# Altium PCB PCB.pcbdoc (part 1 of 3)
Units mil, origin at the board's own origin, x right, y up, seen from the top; angles counter-clockwise.
Board outline 1969.98 x 1969.75 mil, 6 copper layers (Top Layer, GND1, Inner2, PWR3, Inner4, Bottom Layer); 155 components, 199 nets, 988 pads, 612 vias.
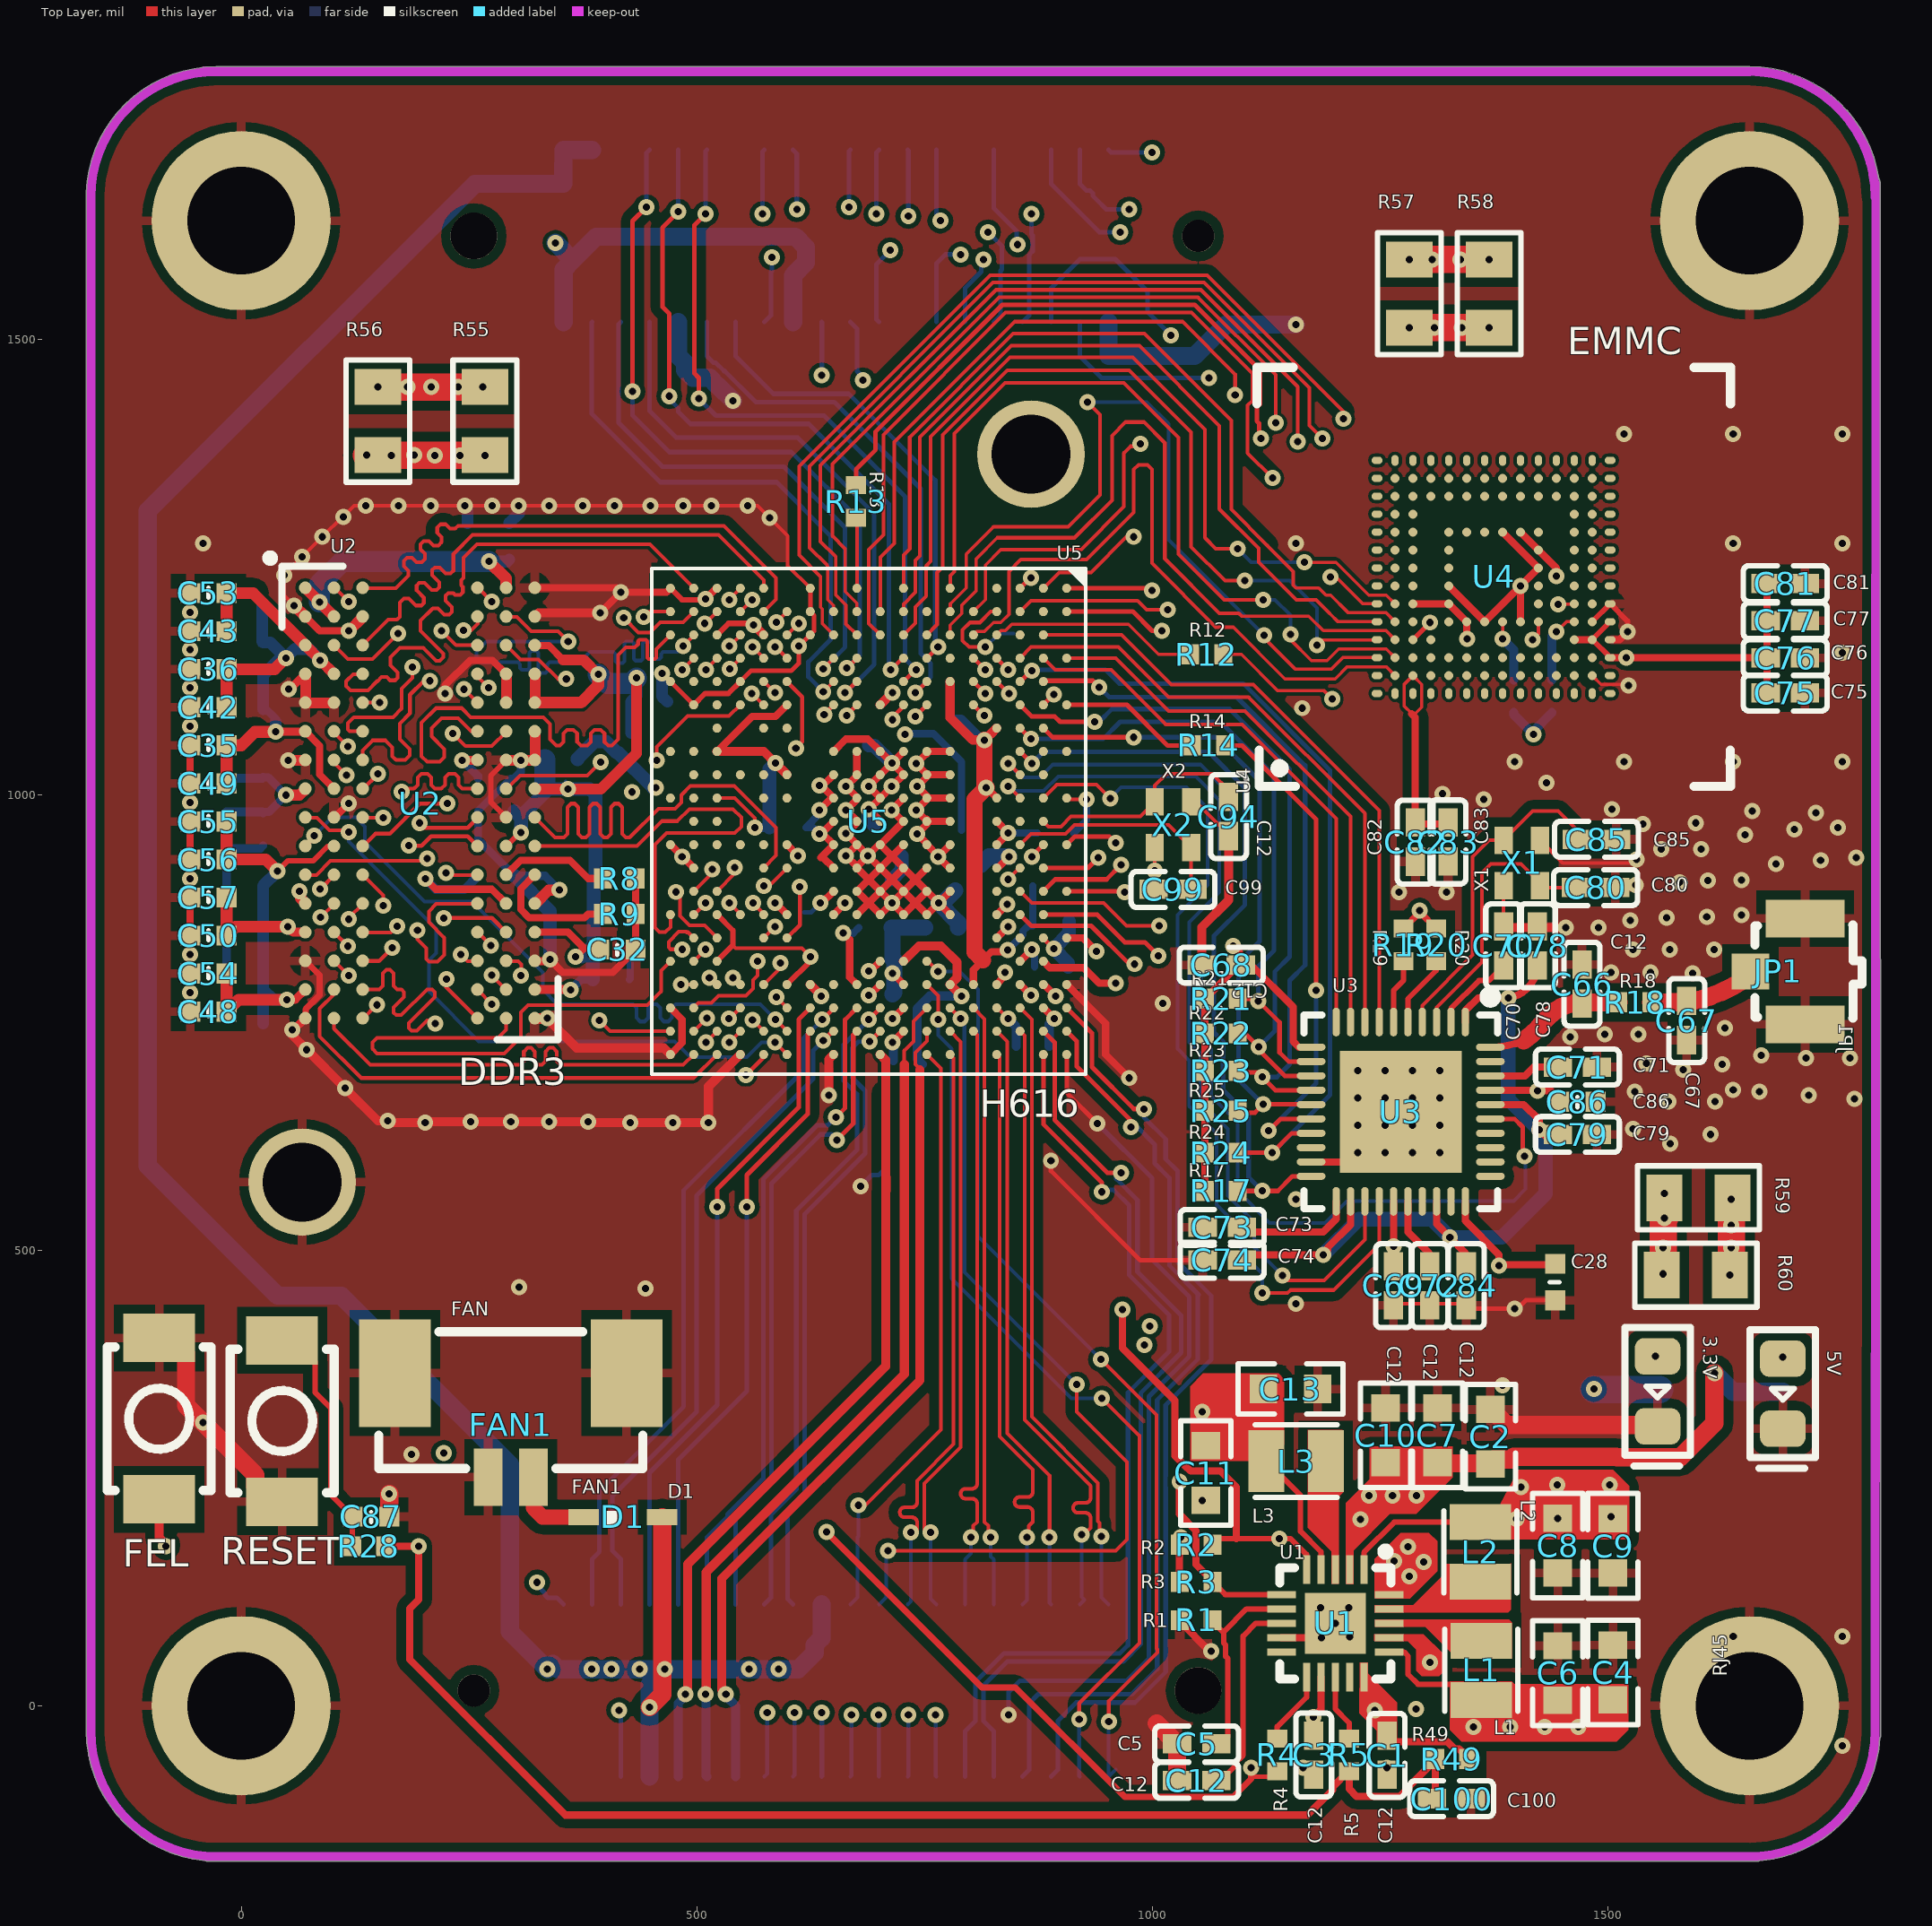
[diagram p0: Top Layer view]
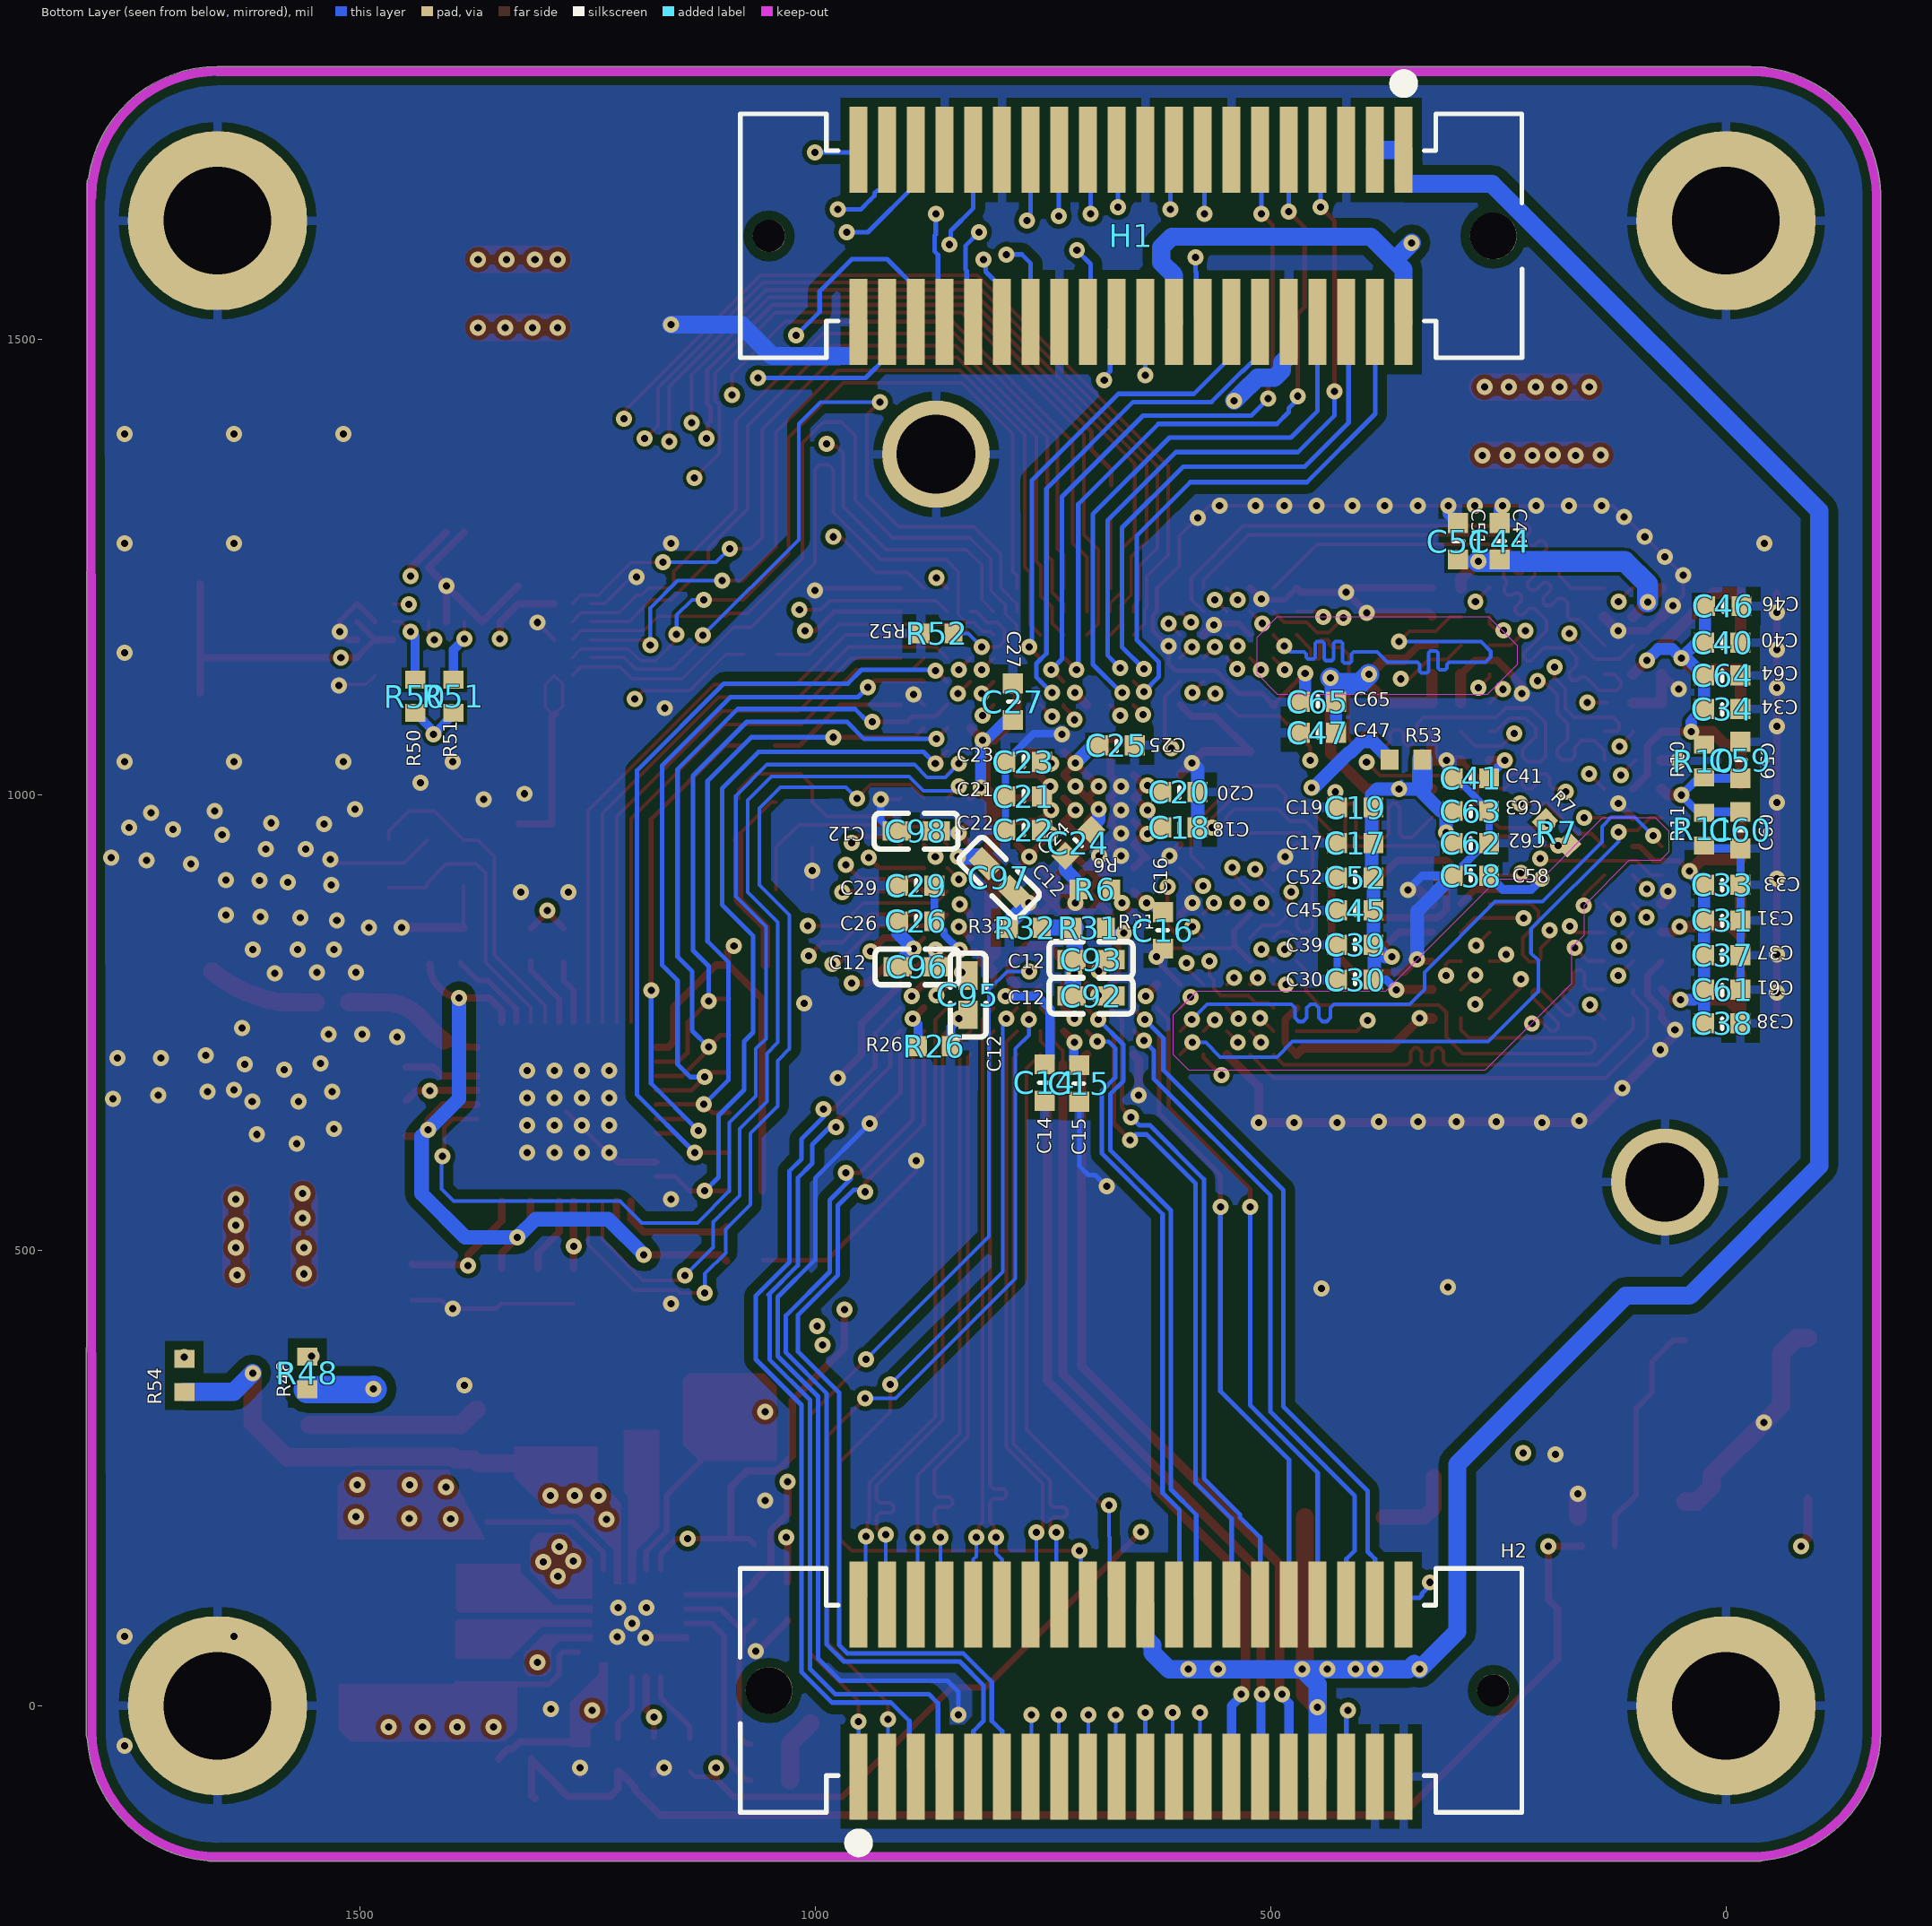
[diagram p1: Bottom Layer view, seen from below]
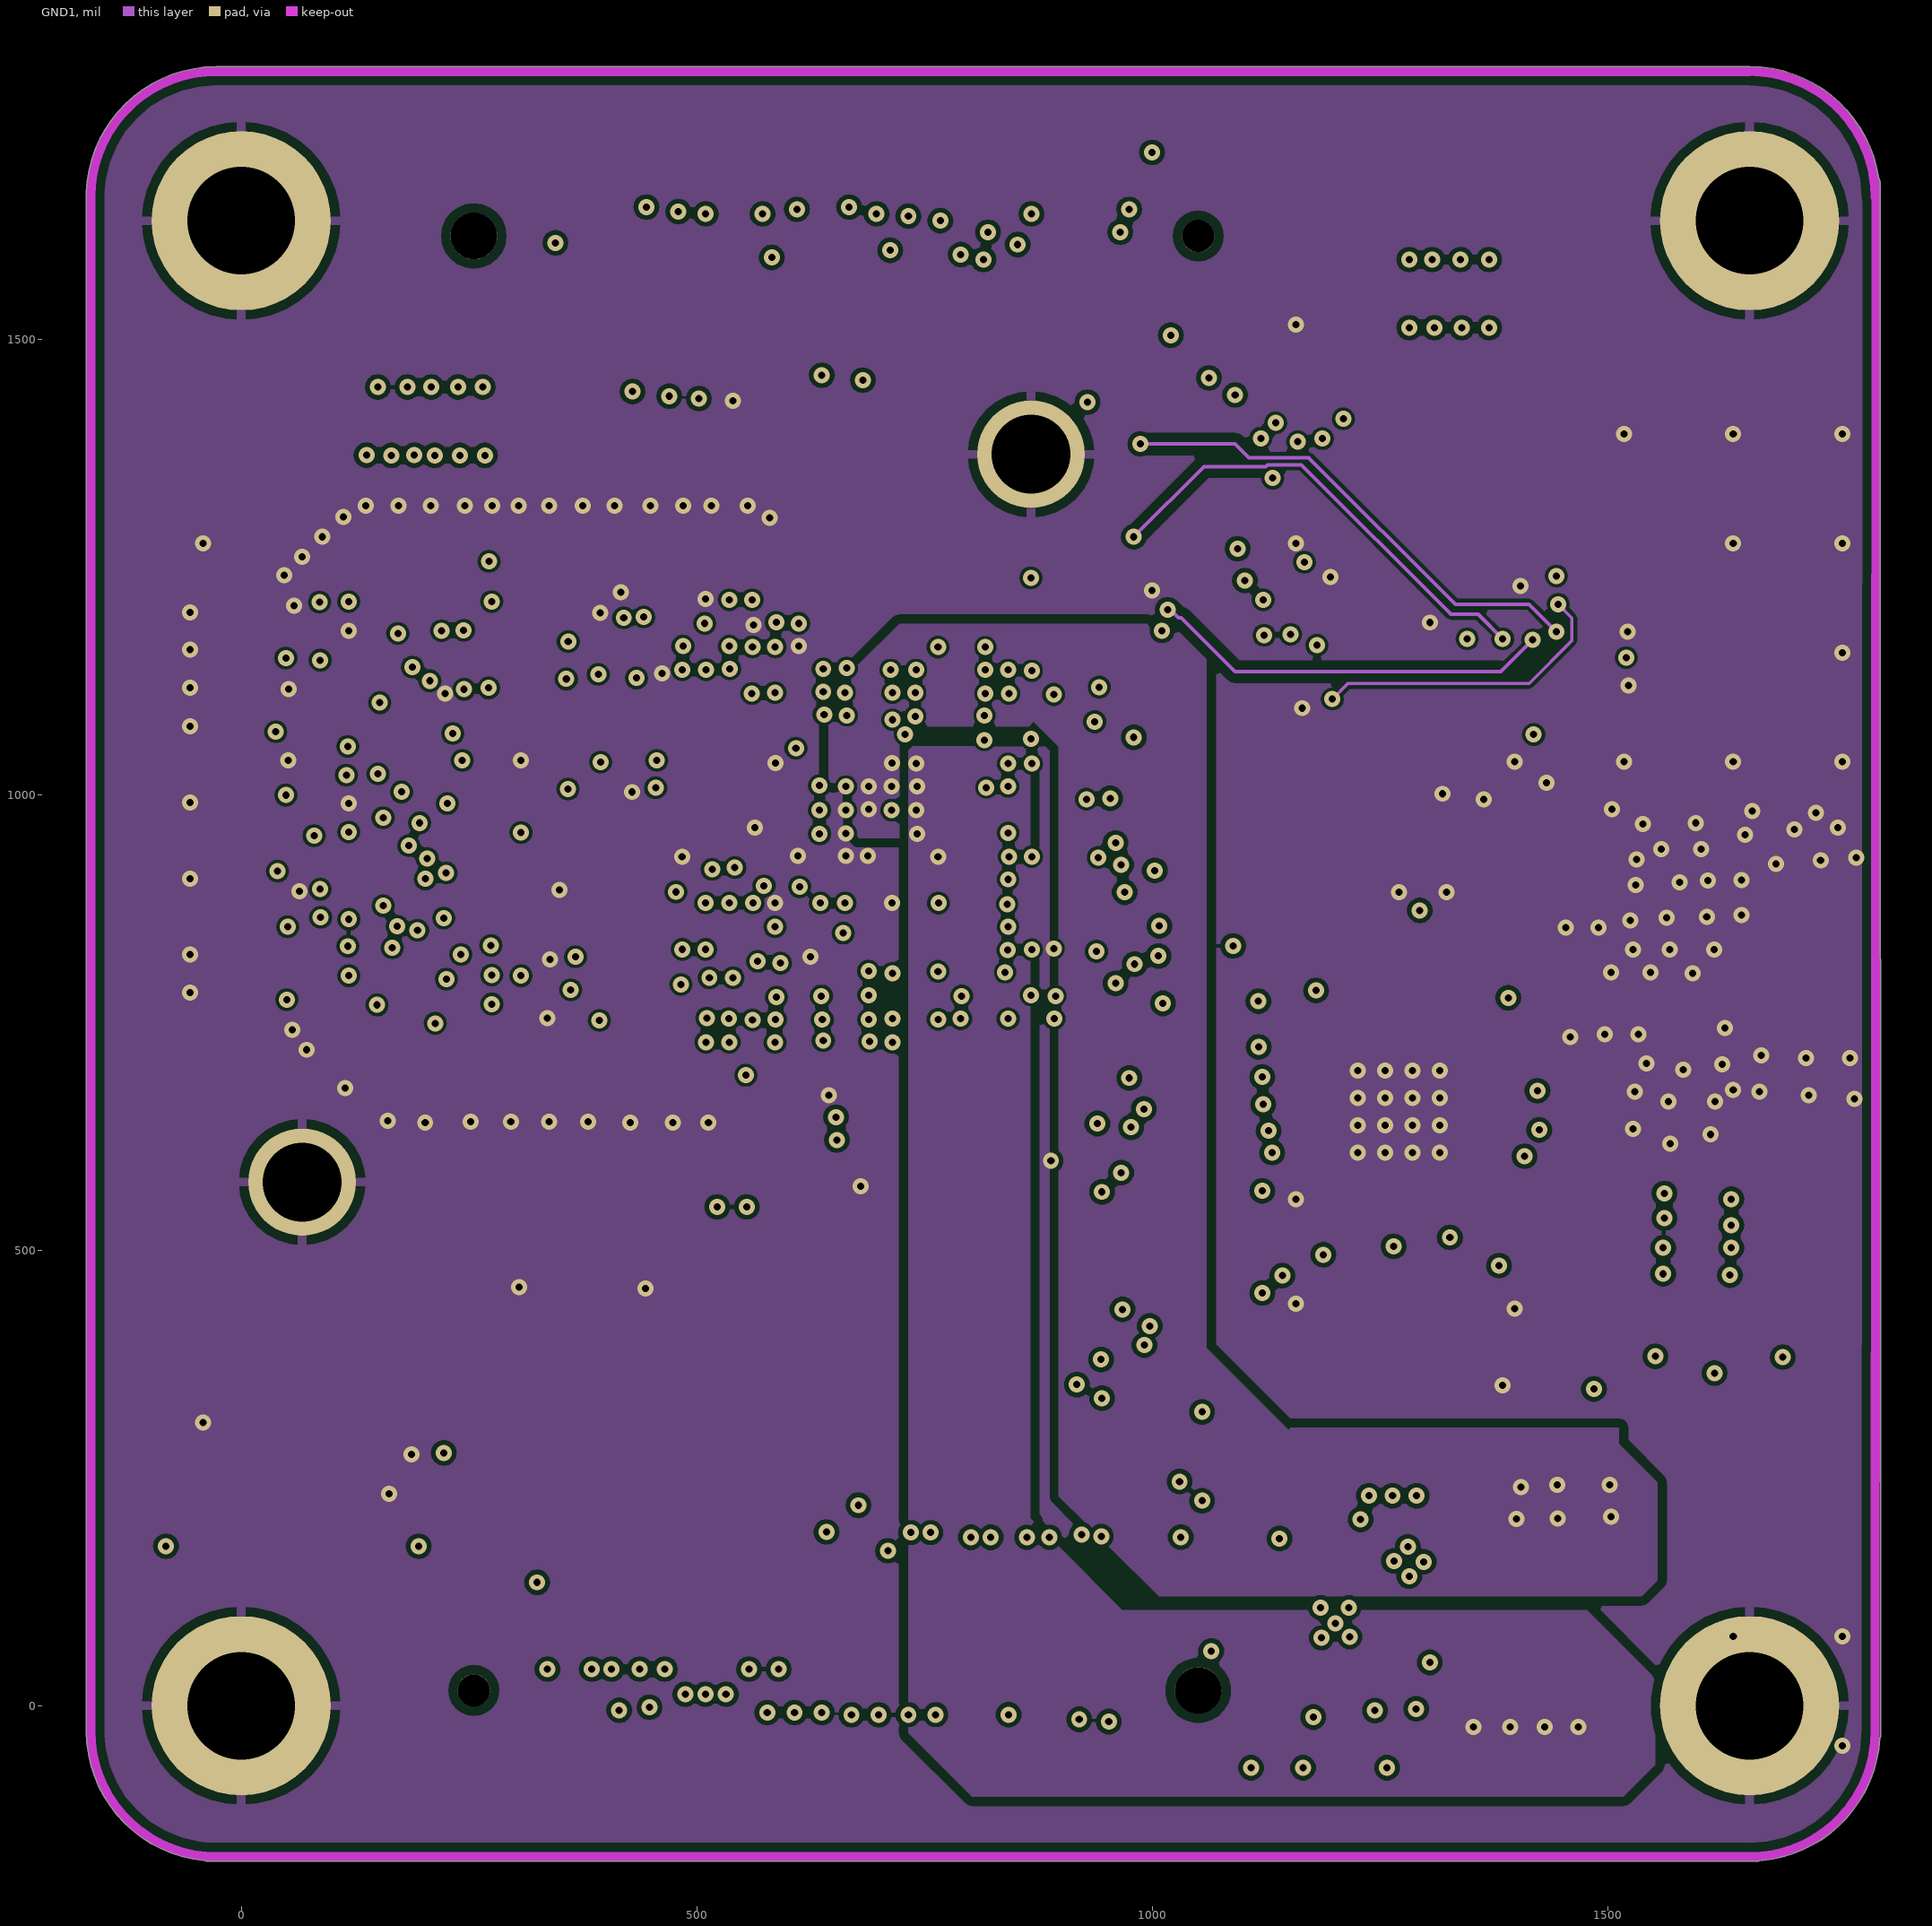
[diagram p2: GND1]
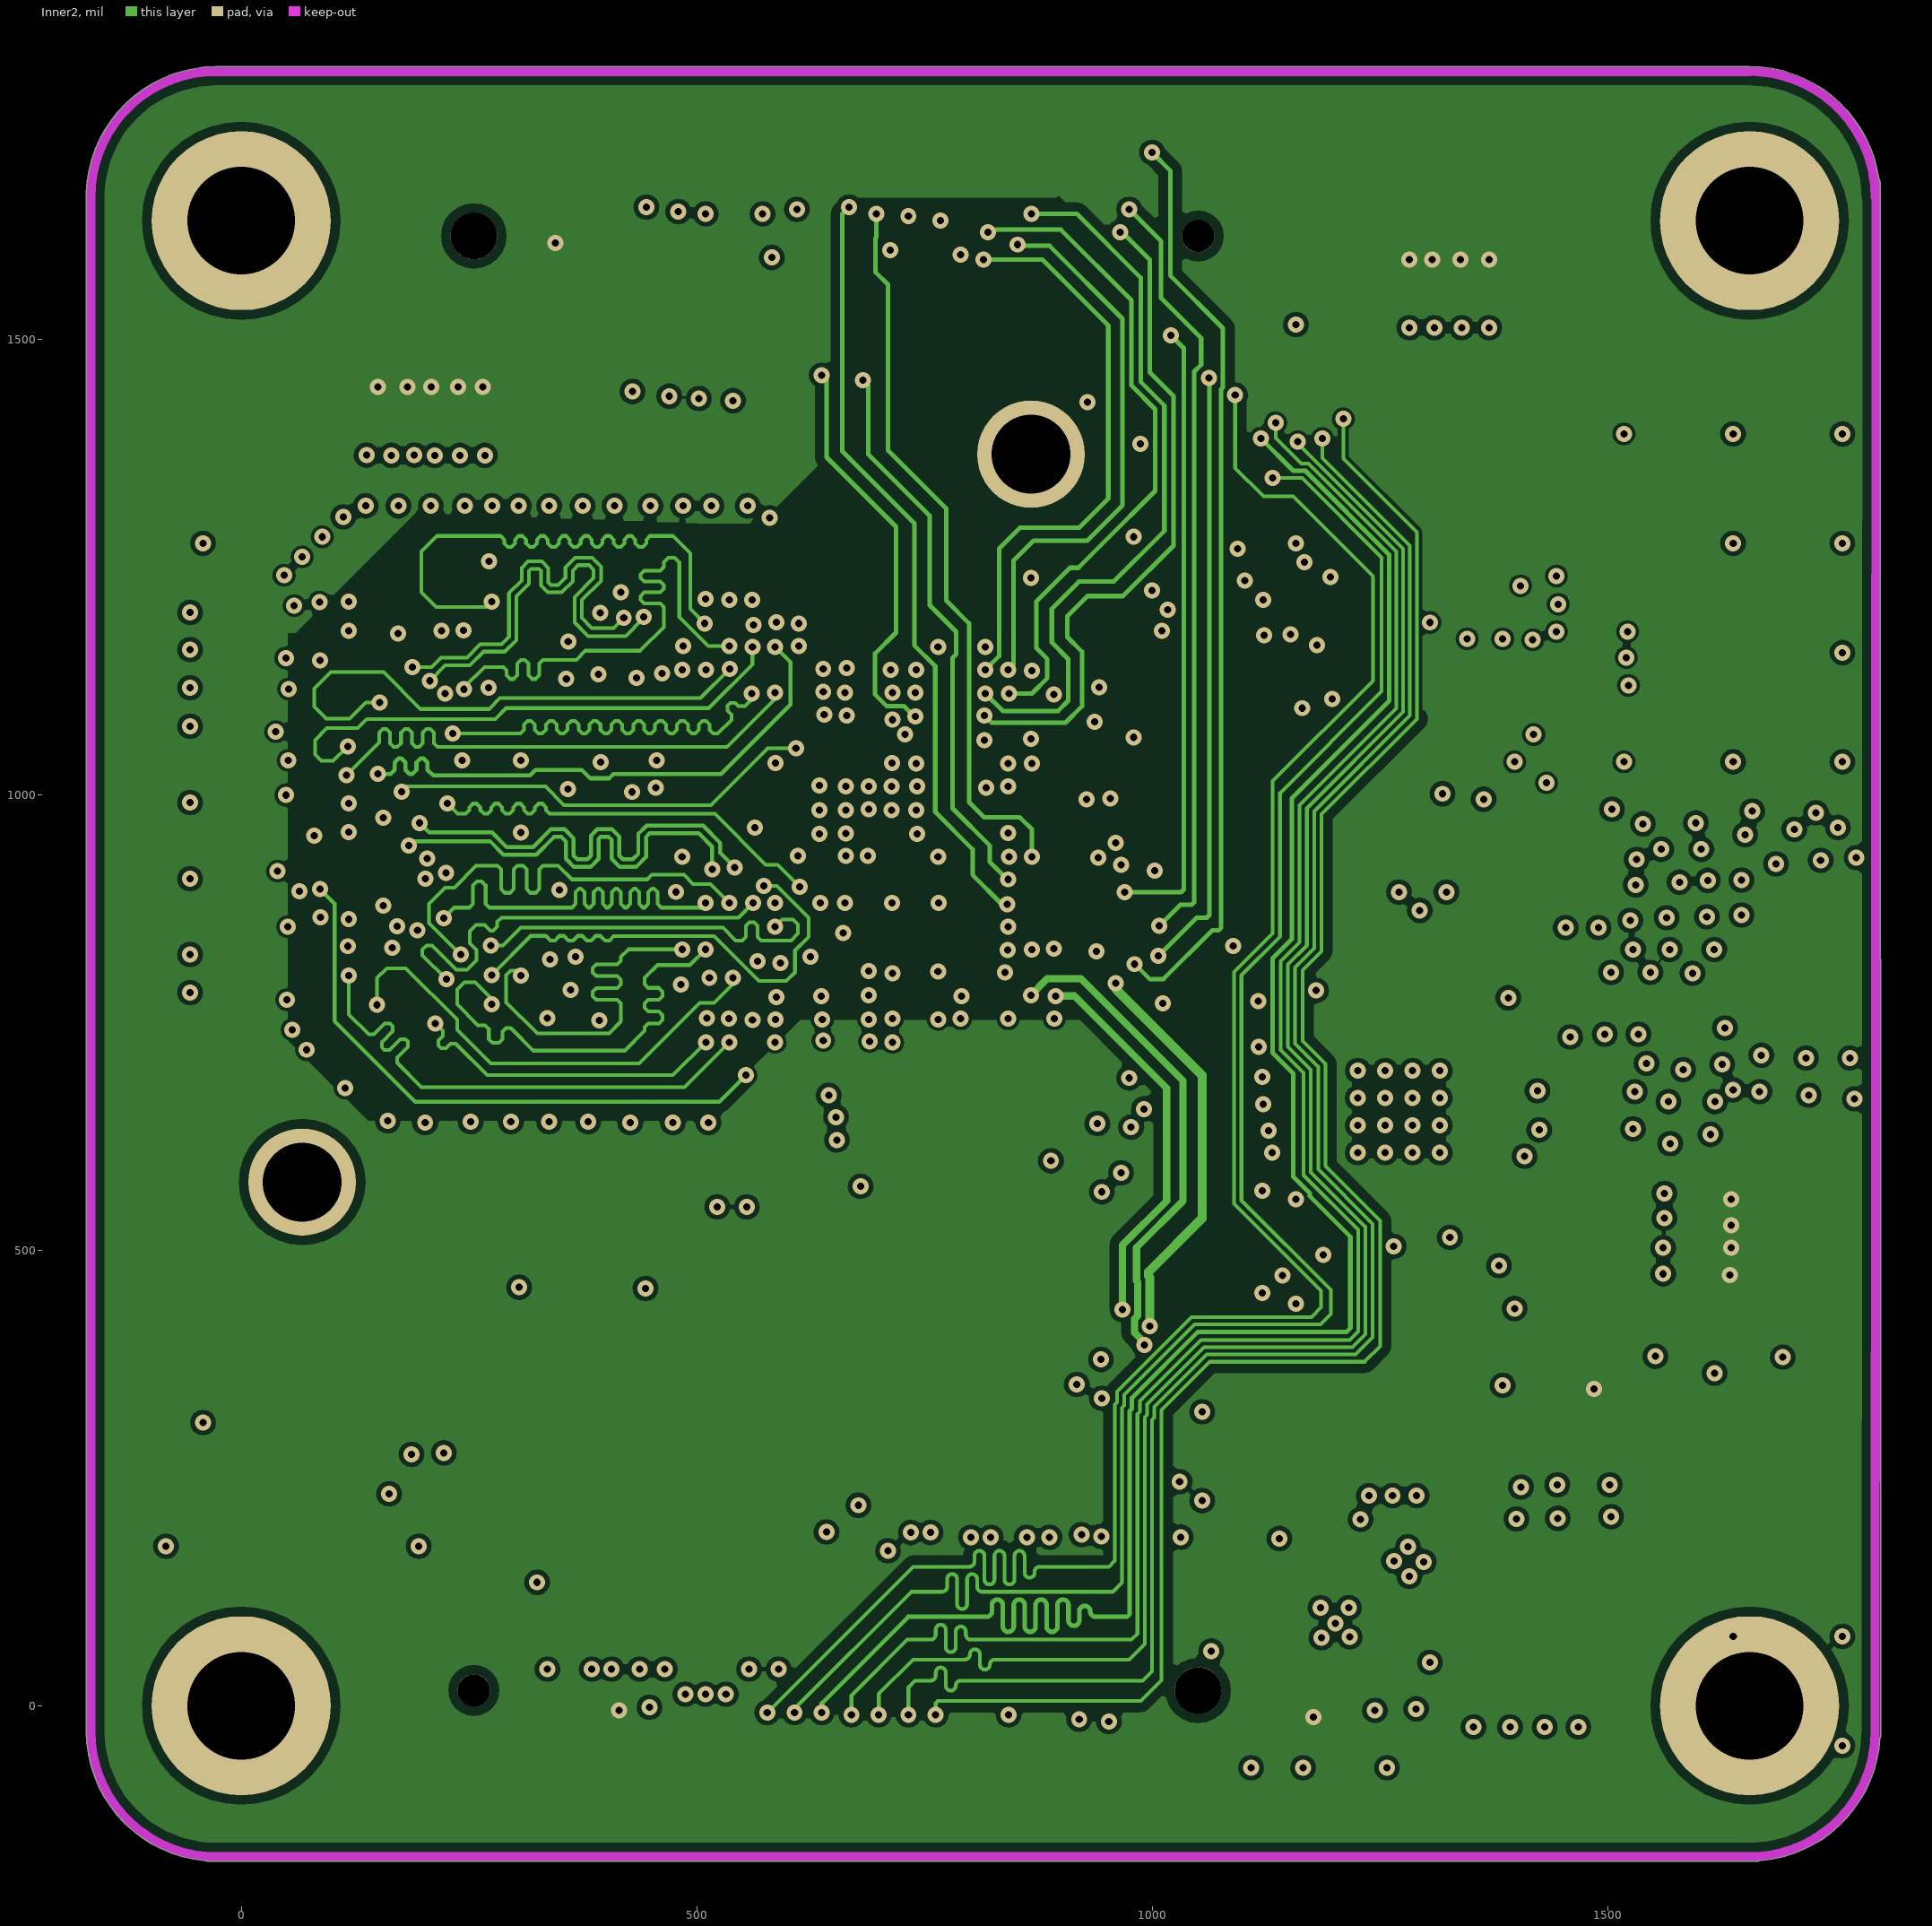
[diagram p3: Inner2]
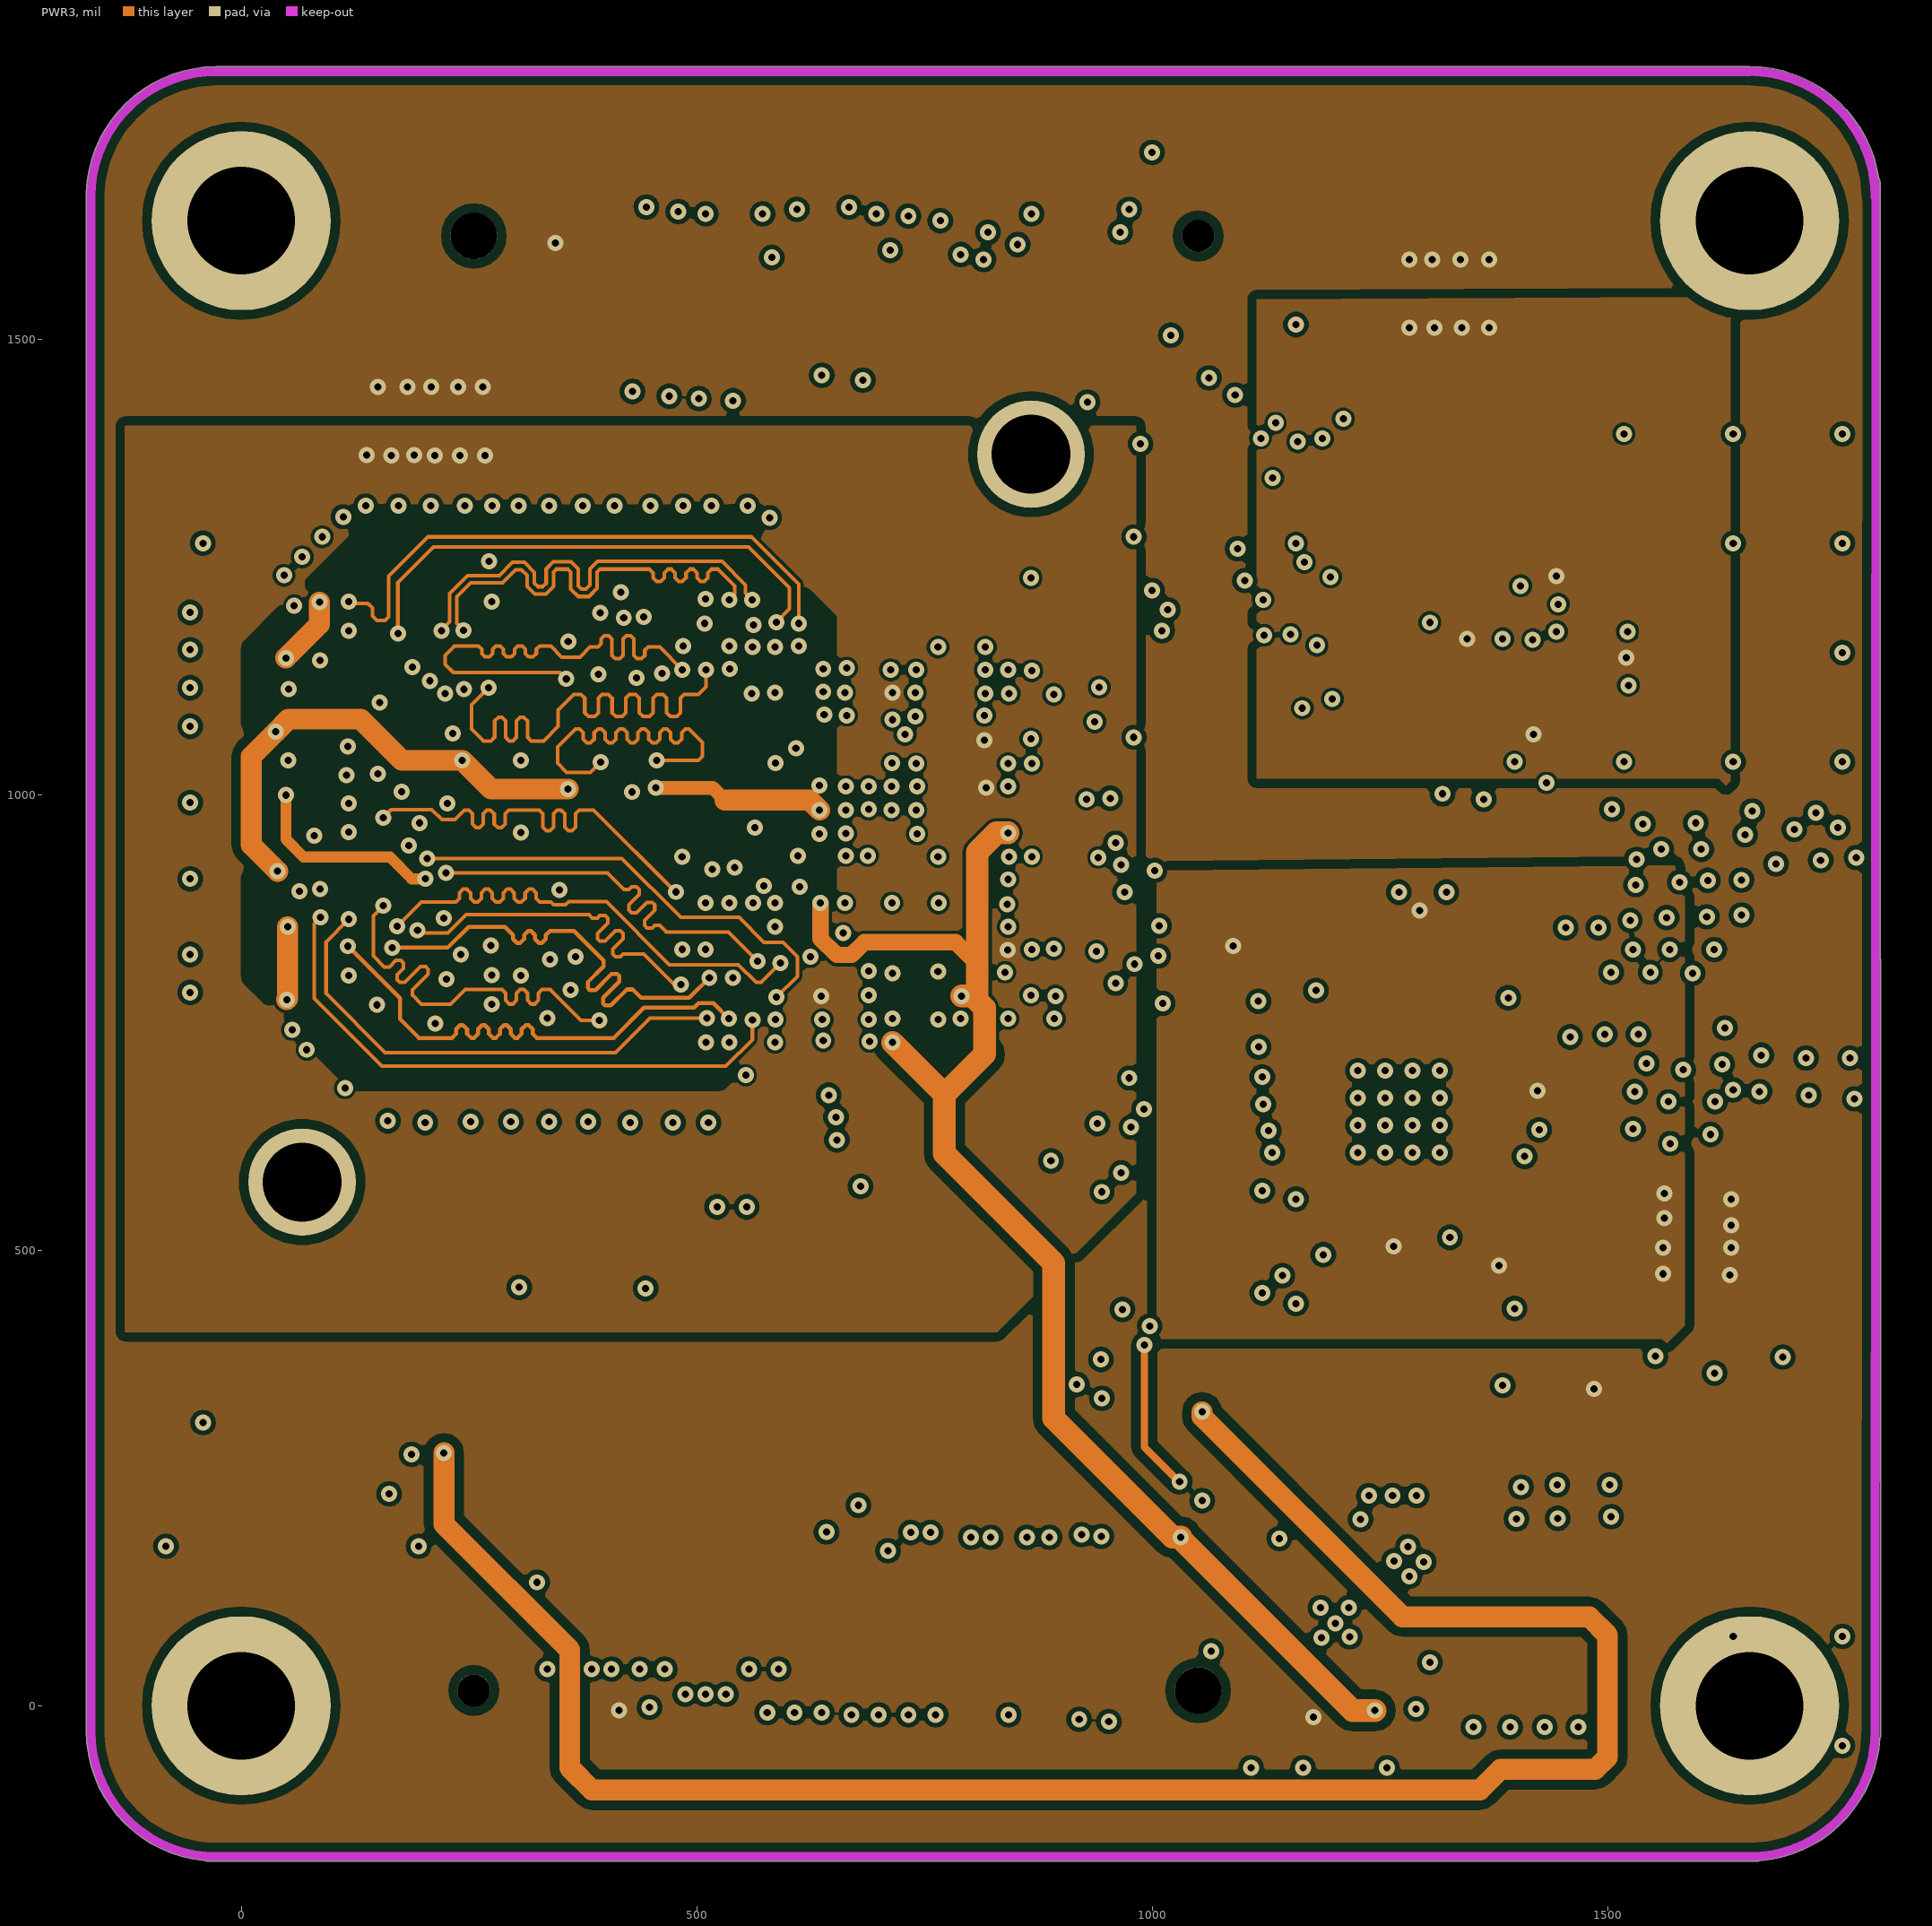
[diagram p4: PWR3]
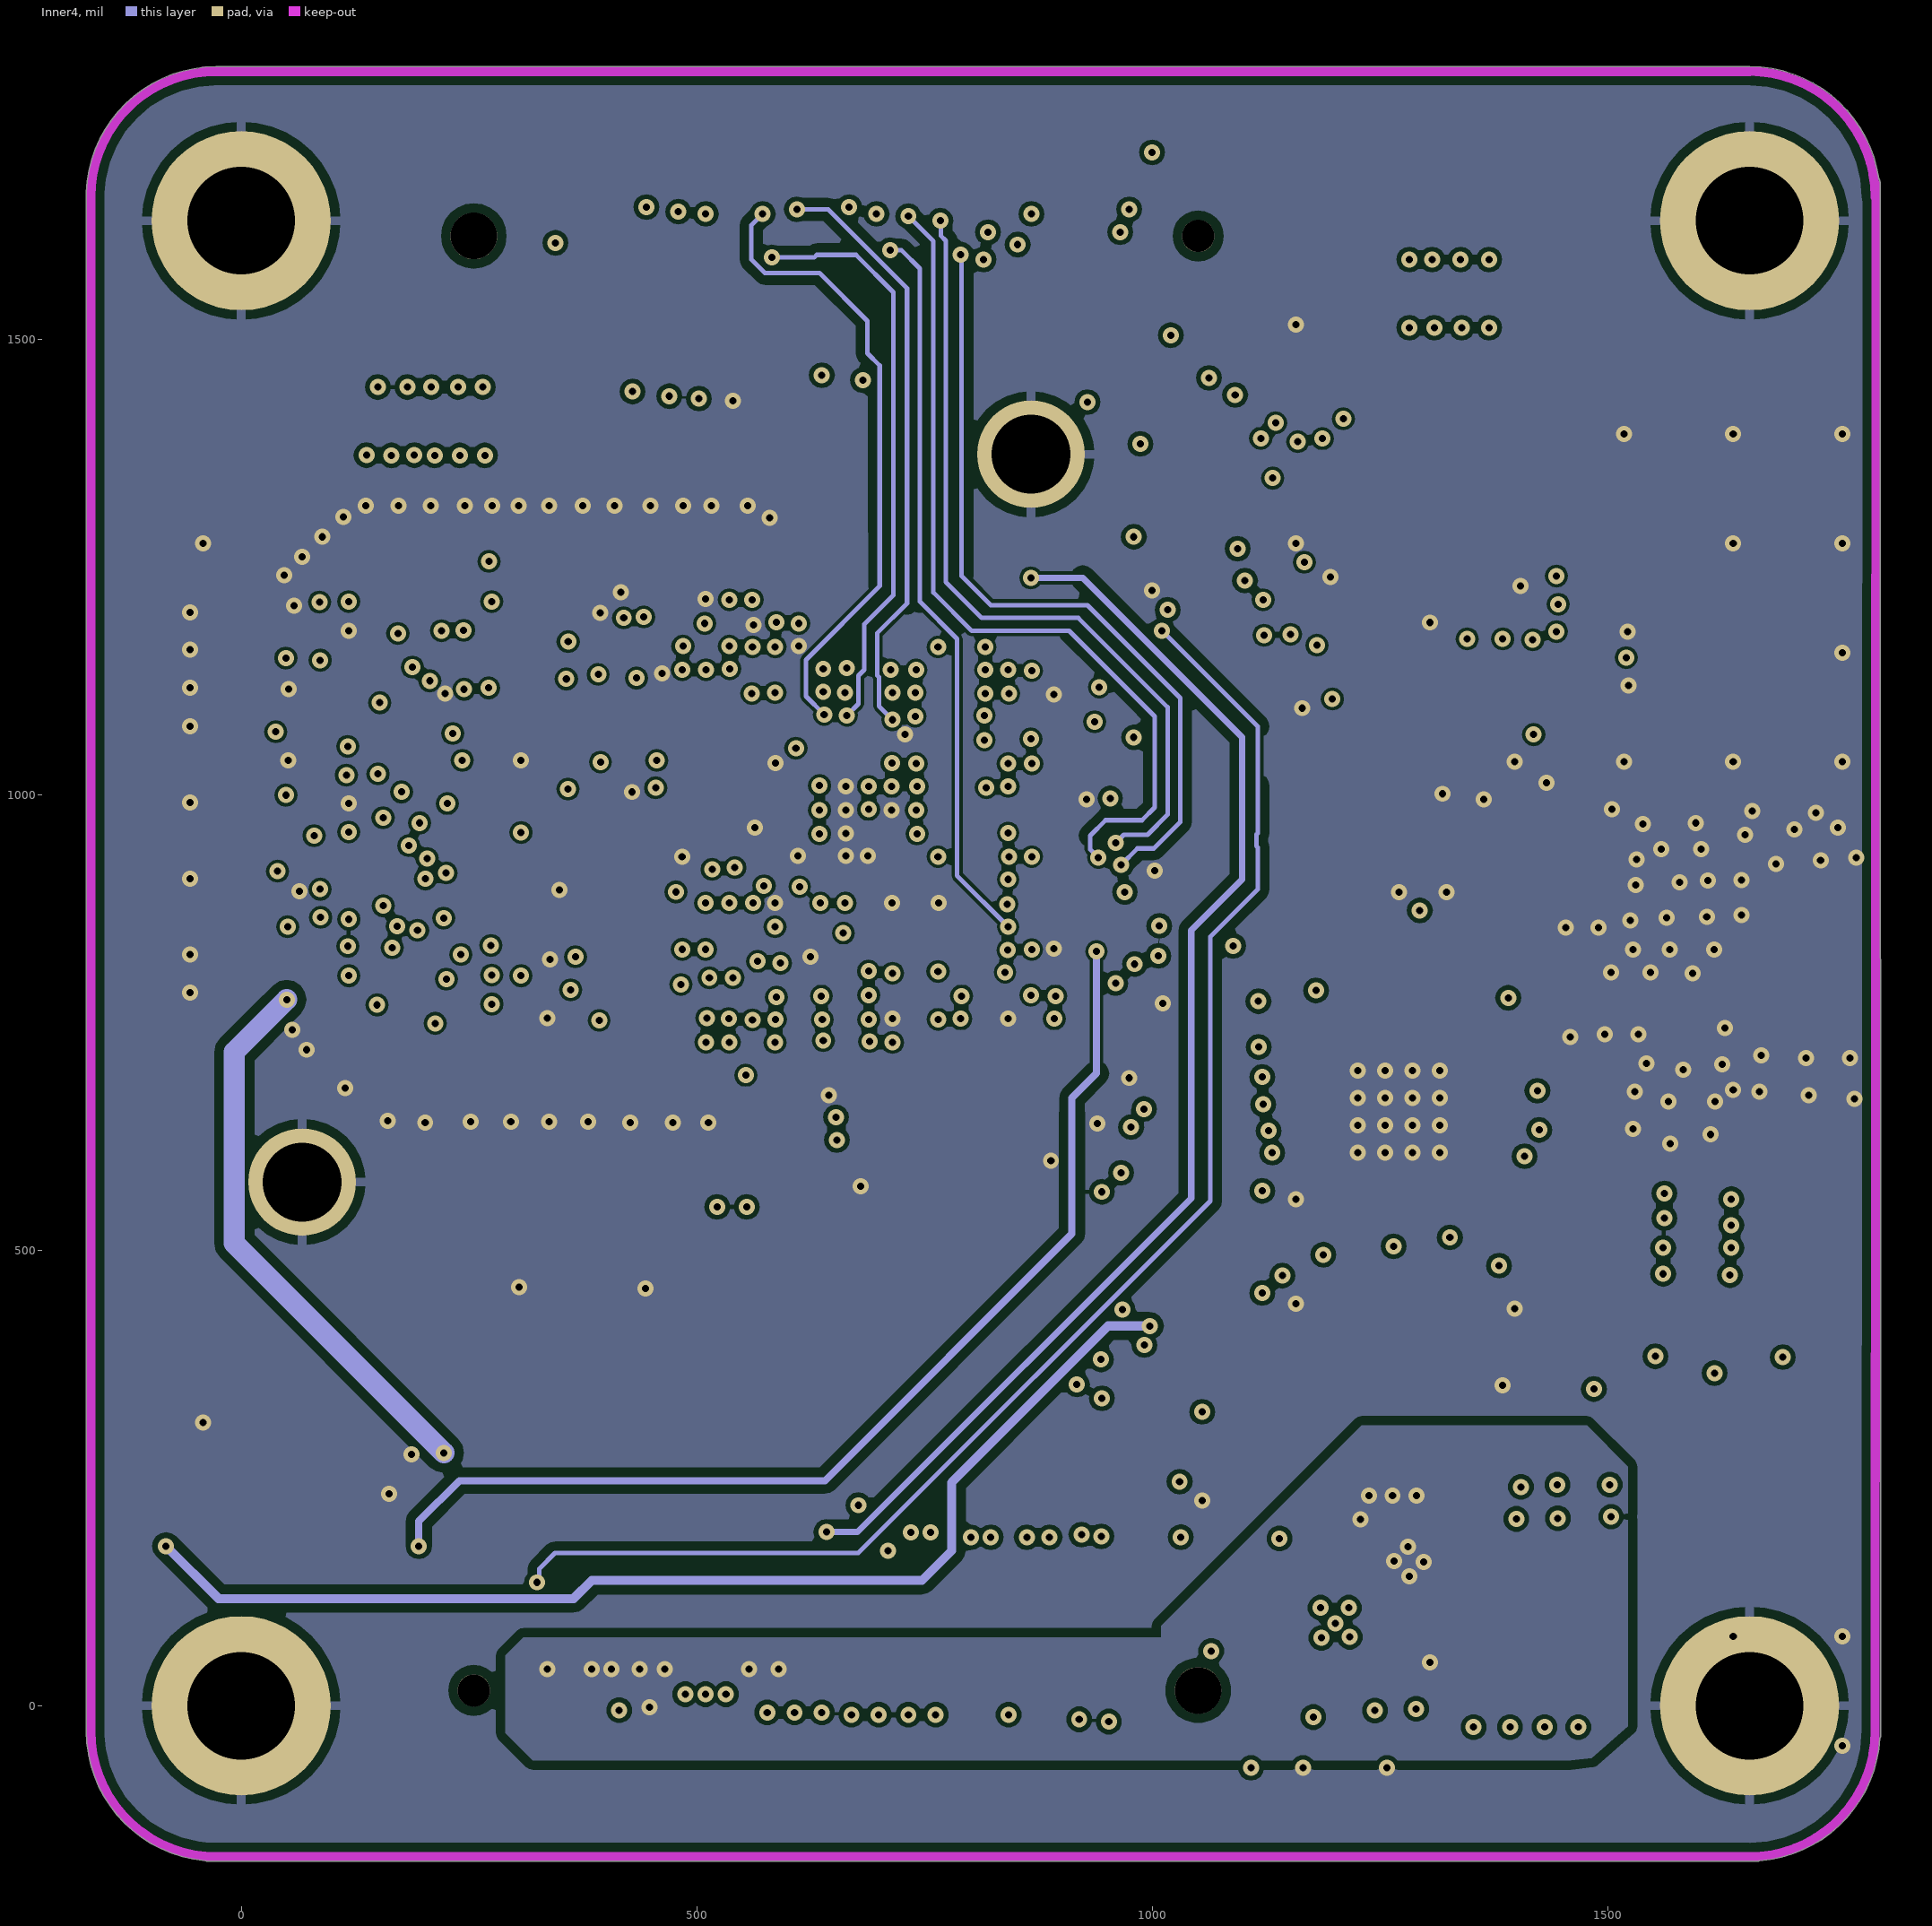
[diagram p5: Inner4]

## Layer stack, top to bottom
Top Solder Mask Layer: solder mask 0.4, Solder Resist, Dk 3.5
Top Layer: signal copper 1.4
Dielectric1: dielectric 12.6, FR-4, Dk 4.8
GND1: signal copper 1.4
Dielectric2: dielectric 12.6, FR-4, Dk 4.8
Inner2: signal copper 1.4
Dielectric3: dielectric 12.6, FR-4, Dk 4.8
PWR3: signal copper 1.4
Dielectric4: dielectric 12.6, FR-4, Dk 4.8
Inner4: signal copper 1.4
Dielectric5: dielectric 12.6, FR-4, Dk 4.8
Bottom Layer: signal copper 1.4
Bottom Solder Mask Layer: solder mask 0.4, Solder Resist, Dk 3.5

## Board outline
-169.96,-27.81 cw(c-164.95,-27.81) -169.96,-27.65 cw(c-165.13,-27.5) -169.96,-27.5 -169.96,1656.27 -169.96,1660 cw(c-164.95,1660) -169.89,1660.84 cw(c-27.15,1656.33) -27.58,1799.14 cw(c-27.18,1671.37) -27.15,1799.14 1656.31,1799.14 cw(c1656.31,1656.33) 1797.76,1676.02 cw(c1794.19,1672.5) 1799.2,1672.5 1800.02,-32.5 cw(c1795,-32.5) 1798.91,-35.64 cw(c1656.31,-27.81) 1666.96,-170.22 cw(c1665,-165.6) 1665,-170.62 -37.5,-170.62 cw(c-37.5,-165.6) -39.81,-170.05 cw(c-27.15,-27.81)

## Design rules (kind name [scope] priority, off if disabled: settings)
BoardOutlineClearance safeClearance_1 [All] p1: gap=10 ignorepadtopadclearanceinfootprint=FALSE except(0: Arc-SplitContinuation Track-SplitContinuation SMDPad-SplitContinuation THPad-SplitContinuation Via-SplitContinuation Fill-SplitContinuation Poly-SplitContinuation Region-SplitContinuation Text-SplitContinuation; 3.5: Track-CutoutEdge SMDPad-OutlineEdge SMDPad-CutoutEdge THPad-OutlineEdge THPad-CutoutEdge Via-CutoutEdge Fill-CutoutEdge Region-CutoutEdge; 11.8: Track-OutlineEdge Via-OutlineEdge Fill-OutlineEdge Poly-OutlineEdge Region-OutlineEdge Text-OutlineEdge)
Clearance room_bga [WithinRoom('room_bga_1') or WithinRoom('room_bga_2')] p1: gap=3.5 ignorepadtopadclearanceinfootprint=FALSE
Clearance via_poly [isvia vs InPoly] p2: gap=5 ignorepadtopadclearanceinfootprint=FALSE
Clearance poly [InPoly] p3: gap=10 ignorepadtopadclearanceinfootprint=FALSE
Clearance Clearance_all [All] p4: gap=4 ignorepadtopadclearanceinfootprint=FALSE
DiffPairsRouting differentialPair [All] p1: maxlimit=4 minlimit=4 mostfreqgap=4 toplayer_minwidth=4 toplayer_maxwidth=100 toplayer_prefwidth=10 midlayer1_minwidth=4 midlayer1_maxwidth=100 midlayer1_prefwidth=10 midlayer2_minwidth=4 midlayer2_maxwidth=100 midlayer2_prefwidth=10 midlayer3_minwidth=4 midlayer3_maxwidth=100 midlayer3_prefwidth=10 midlayer4_minwidth=4 midlayer4_maxwidth=100 midlayer4_prefwidth=10 bottomlayer_minwidth=4 bottomlayer_maxwidth=100 bottomlayer_prefwidth=10 maxuncoupledlength=50
PasteMaskExpansion pasteMaskExpansion [All] p1: expansion=0
PlaneConnect innerPlane [All] p1: planeconnectstyle=Relief reliefexpansion=20 reliefentries=4 reliefconductorwidth=10 reliefairgap=10
PolygonConnect copperRegion [All] p1: thpad.connectstyle=Relief thpad.reliefconductorwidth=10 thpad.reliefentries=4 thpad.polygonreliefangle="90 Angle" thpad.airgapwidth=10 smdpad.connectstyle=Relief smdpad.reliefconductorwidth=10 smdpad.reliefentries=4 smdpad.polygonreliefangle="90 Angle" smdpad.airgapwidth=10 via.connectstyle=Direct via.reliefconductorwidth=10 via.reliefentries=4 via.polygonreliefangle="90 Angle" via.airgapwidth=10
PolygonConnect TBCopper [All] p2: connectstyle=Relief reliefconductorwidth=6 reliefentries=4 polygonreliefangle="90 Angle" airgapwidth=6
PolygonConnect DRAMCopper [All] p3: connectstyle=Relief reliefconductorwidth=4 reliefentries=4 polygonreliefangle="90 Angle" airgapwidth=4
RoomDefinition room_bga_2 [False] p1: confinementstyle=ConfineIn formatcopy=TRUE lockcomponents=FALSE outline 1115,1467.5 1635,1467.5 1635,1010 1115,1010
RoomDefinition room_bga_1 [False] p2: confinementstyle=ConfineIn formatcopy=TRUE lockcomponents=FALSE outline 12.5,1290 947.14,1290 947.14,671.86 12.5,671.86
RoutingVias viaSize [All] p1: holewidth=7.9 width=17.7 viastyle="Through Hole" minholewidth=7.9 minwidth=17.7 maxholewidth=7.9 maxwidth=17.7
SolderMaskExpansion solderMaskExpansion [All] p1: expansion=4 istentingtop=FALSE useseparateexpansions=TRUE expansionbottom=4 istentingbottom=FALSE
Width trackWidth [All] p1: maxlimit=100 minlimit=4 preferedwidth=4
27 further rules are at their usual default settings.

## Classes and differential pairs
net class PWR: 1V8 3V3_WIFI AGND GND VBUS VCC_DRAM VDD_CPU VDD_GPU
net class USB: D0+ D0- D1+ D1- D2+ D2- D3+ D3-
net class HDMI: HDMI_0N HDMI_0P HDMI_1N HDMI_1P HDMI_2N HDMI_2P HDMI_CN HDMI_CP
net class SD: SDC0_CLK SDC0_CMD SDC0_D0 SDC0_D1 SDC0_D2 SDC0_D3 SDC0_DET
component class 4_PREP: C87 C92 C93 C94 C95 C96 C97 C98 C99 FEL H2 R26 R28 R31 R32 RESET X2
component class 3_IO: C66 C67 C68 C69 C70 C71 C72 C73 C74 C75 C76 C77 C78 C79 C80 C81 C82 C83 C84 C85 C86 H1 JP1 R12 R13 R14 R17 R18 R19 R20 R21 R22 R23 R24 R25 R50 R51 R52 U3 U4 X1
component class 2_DRAM: C30 C31 C32 C33 C34 C35 C36 C37 C38 C39 C40 C41 C42 C43 C44 C45 C46 C47 C48 C49 C50 C51 C52 C53 C54 C55 C56 C57 C58 C59 C60 C61 C62 C63 C64 C65 R6 R7 R8 R9 R10 R11 R53 U2 U5
component class 1_POWER: C1 C2 C3 C4 C5 C6 C7 C8 C9 C10 C11 C12 C13 C14 C15 C16 C17 C18 C19 C20 C21 C22 C23 C24 C25 C26 C27 C28 C29 C100 D1 FAN1 L1 L2 L3 R1 R2 R3 R4 R5 R48 R49 R54 R55 R56 R57 R58 R59 R60 U1

## Components (designator, comment, footprint, x,y, rotation, side; value= is the part's Value field where it differs from the comment)
3.3V "红色" LED0805_G 1555,345 r270 top (schematic designator LED1)
5V "红色" LED0805_G 1692.5,342.5 r270 top (schematic designator LED2)
C1 "4.7uf" C0402 1258,-54.5 r90 top
C2 "4.7uf" C0603 1371.42,295.21 r90 top
C3 "4.7uf" C0402 1177.44,-54.23 r90 top
C4 "22uf" C0603 1506.12,36.42 r90 top
C5 "4.7uf" C0402 1049,-42 r0 top
C6 "22uf" C0603 1445.44,35.77 r90 top
C7 "4.7uf" C0603 1313.44,296.77 r90 top
C8 "22uf" C0603 1445.44,175.77 r270 top
C9 "22uf" C0603 1506.12,175.42 r270 top
C10 "4.7uf" C0603 1256.44,296.77 r90 top
C11 "22uf" C0603 1059,255.5 r270 top
C12 "1uf" C0402 1049,-82 r0 top
C13 "22uf" C0603 1152,347.5 r0 top
C14 "100nF" C0402-NSK 748,684 r90 bottom
C15 "100nF" C0402-NSK 710,683 r90 bottom
C16 "100nF" C0402-NSK 618,851 r90 bottom
C17 "100nF" C0402-NSK 406.98,947.01 r180 bottom
C18 "100nF" C0402-NSK 599.97,964.01 r0 bottom
C19 "100nF" C0402-NSK 407.02,985.96 r180 bottom
C20 "100nF" C0402-NSK 599.97,1003.01 r0 bottom
C21 "100nF" C0402-NSK 771,998 r180 bottom
C22 "100nF" C0402-NSK 771,961 r180 bottom
C23 "100nF" C0402-NSK 771,1036 r180 bottom
C24 "100nF" C0402-NSK 711,947 r135 bottom
C25 "100nF" C0402-NSK 669,1054 r0 bottom
C26 "100nF" C0402-NSK 889,861 r180 bottom
C27 "100nF" C0402-NSK 783,1102 r270 bottom
C28 "100nF" C0402-NSK 1442.5,465 r90 top
C29 "100nF" C0402-NSK 889,900 r180 bottom
C30 "100nF" C0402-NSK 407,797 r180 bottom
C31 "100nF" C0402-NSK 4,862 r0 bottom
C32 "100nF" C0402-NSK 413,830 r180 top
C33 "100nF" C0402-NSK 4,901 r0 bottom
C34 "100nF" C0402-NSK 4,1094 r0 bottom
C35 "100nF" C0402-NSK -36,1054.15 r0 top
C36 "100nF" C0402-NSK -36,1137.69 r0 top
C37 "100nF" C0402-NSK 4,824 r0 bottom
C38 "100nF" C0402-NSK 4,749 r0 bottom
C39 "100nF" C0402-NSK 407,835 r180 bottom
C40 "100nF" C0402-NSK 3.99,1167 r0 bottom
C41 "100nF" C0402-NSK 280,1018 r180 bottom
C42 "100nF" C0402-NSK -36,1095.92 r0 top
C43 "100nF" C0402-NSK -36,1179.46 r0 top
C44 "100nF" C0402-NSK 248.58,1278.16 r270 bottom
C45 "100nF" C0402-NSK 407,873 r180 bottom
C46 "100nF" C0402-NSK 2.99,1207 r0 bottom
C47 "100nF" C0402-NSK 448,1068 r180 bottom
C48 "100nF" C0402-NSK -36,761.77 r0 top
C49 "100nF" C0402-NSK -36,1012.38 r0 top
C50 "100nF" C0402-NSK -36,845.31 r0 top
C51 "100nF" C0402-NSK 294.27,1278.16 r270 bottom
C52 "100nF" C0402-NSK 407,909 r180 bottom
C53 "100nF" C0402-NSK -36,1221.23 r0 top
C54 "100nF" C0402-NSK -36,803.54 r0 top
C55 "100nF" C0402-NSK -36,970.62 r0 top
C56 "100nF" C0402-NSK -36,928.85 r0 top
C57 "100nF" C0402-NSK -36,887.08 r0 top
C58 "100nF" C0402-NSK 280,911 r180 bottom
C59 "100nF" C0402-NSK -16,1038 r270 bottom
C60 "100nF" C0402-NSK -16,961 r90 bottom
C61 "100nF" C0402-NSK 3.99,786 r0 bottom
C62 "100nF" C0402-NSK 280,947 r0 bottom
C63 "100nF" C0402-NSK 280,982 r0 bottom
C64 "100nF" C0402-NSK 4,1131 r0 bottom
C65 "100nF" C0402-NSK 448,1102 r180 bottom
C66 "NC" C0402 1472,792 r270 top
C67 "NC" C0402 1587,752 r90 top
C68 "1uF" C0402 1075.99,813 r180 top
C69 "1uF" C0402 1265,461 r270 top
C70 "1uF" C0402 1386,834 r90 top
C71 "1uF" C0402 1467,701 r0 top
C72 "1uF" C0402 1305,461 r270 top
C73 "1uF" C0402 1077,525 r180 top
C74 "1uF" C0402 1077,489 r180 top
C75 "2.2uF" C0402 1695.16,1111.58 r180 top
C76 "2.2uF" C0402 1695.16,1150.27 r180 top
C77 "2.2uF" C0402 1695.16,1190.95 r180 top
C78 "1uF" C0402 1423,834 r90 top
C79 "1uF" C0402 1467,627 r0 top
C80 "22pf" C0402 1487,898 r0 top
C81 "2.2uF" C0402 1695.16,1231.64 r180 top
C82 "2.2uF" C0402 1288.94,947.91 r90 top
C83 "2.2uF" C0402 1324.92,948.06 r90 top
C84 "1uF" C0402 1345,461 r270 top
C85 "22pf" C0402 1488,951 r0 top
C86 "100nF" c0402-nsk_1 1467,663 r180 top
C87 "100nF" C0402-NSK 142.5,207.5 r180 top
C92 "470nF" C0402 697,779 r180 bottom
C93 "470nF" C0402 697,819 r180 bottom
C94 "22pf" C0402 1084,976 r270 top
C95 "2.2uF" C0402 832,780 r90 bottom
C96 "1uF" C0402 888,811 r180 bottom
C97 "220nF" C0402 798,909 r225 bottom
C98 "100nf" C0402 889,960 r0 bottom
C99 "22pf" C0402 1023,896 r180 top
C100 "100nF" C0402 1328.81,-102.14 r180 top
D1 "B5819WS" SOD-323_L1.8-W1.3-LS2.5-NSK 419,207 r0 top
FAN1 "0533980271" CONN-SMD_2P-P1.25_053398-0X71 296,308 r180 top
FEL "GT-TC029B-H020-L1N" SW-SMD_L3.9-W2.9-P4.15-LS5.0 -90,315 r90 top (schematic designator SW2)
H1 "BA42-40AT-0-NHB" CONN-SMD_40P-P0.80_10144517-042802LF 653,1630 r180 bottom
H2 "BA42-40AT-0-NHB" CONN-SMD_40P-P0.80_10144517-042802LF 653,0 r0 bottom
JP1 "U.FL-R-SMT-1(80)_C88374" RF-SMD_FRF05002-JSS103M 1687,806 r90 top
L1 "1uH" IND-SMD_L2.0-W1.6_1 1361.44,38.77 r90 top
L2 "1uH" IND-SMD_L2.0-W1.6_1 1360.44,168.77 r270 top
L3 "1uH" IND-SMD_L2.0-W1.6_1 1158.12,268.42 r0 top
R1 "510" R0402-NSK_2 1048.44,93.77 r0 top
R2 "2k" R0402-NSK_2 1048.44,176.77 r0 top
R3 "2k" R0402-NSK_2 1048.44,135.77 r0 top
R4 "0" R0402-NSK_2 1137.44,-54.23 r90 top
R5 "0" R0402-NSK_2 1216.44,-54.23 r90 top
R6 "240" R0402-NSK_2 693,896 r0 bottom
R7 "100" R0402-NSK_2 186,958 r225 bottom
R8 "240" R0402-NSK_2 415,908 r180 top
R9 "240" R0402-NSK_2 415,869 r180 top
R10 "2k" R0402-NSK_2 24,1037 r90 bottom
R11 "2k" R0402-NSK_2 24,962 r90 bottom
R12 "33" R0402-NSK_2 1060,1154 r180 top
R13 "33" R0402-NSK_2 675,1322 r270 top
R14 "33" R0402-NSK_2 1062,1054.01 r180 top
R17 "47K" R0402-NSK_2 1076,565 r0 top
R18 "0" R0402-NSK_2 1530,772 r0 top
R19 "47K" R0402-NSK_2 1276,835 r270 top
R20 "47K" R0402-NSK_2 1312,835 r270 top
R21 "47K" R0402-NSK_2 1076,776 r0 top
R22 "47K" R0402-NSK_2 1076,738 r0 top
R23 "47K" R0402-NSK_2 1076,697 r0 top
R24 "47K" R0402-NSK_2 1076,607 r0 top
R25 "47K" R0402-NSK_2 1076,653 r0 top
R26 "6.04k" R0402-NSK_2 869,724 r180 bottom
R28 "510" R0402-NSK_2 140,175 r180 top
R31 "150K" R0402-NSK_2 699,854 r180 bottom
R32 "0" R0402-NSK_2 769,854 r180 bottom
R48 "5.1k" R0402-NSK_2 1557.5,365 r270 bottom
R49 "10K" R0402-NSK_2 1329,-58.5 r0 top
R50 "47K" R0402-NSK_2 1439,1108 r90 bottom
R51 "47K" R0402-NSK_2 1397,1108 r90 bottom
R52 "10K" R0402-NSK_2 866,1177 r0 bottom
R53 "0" R0402-NSK_2 351.31,1038.57 r180 bottom
R54 "5.1k" R0402-NSK_2 1692.5,362.5 r270 bottom
R55 "0" R0805_L 267.5,1410 r270 top
R56 "0" R0805_L 150,1410 r270 top
R57 "0" R0805_L 1282.5,1550 r270 top
R58 "0" R0805_L 1370,1550 r270 top
R59 "0" R0805_L 1600,557.5 r180 top
R60 "0" R0805_L 1597.11,472.5 r180 top
RESET "GT-TC029B-H020-L1N" SW-SMD_L3.9-W2.9-P4.15-LS5.0 45,312.5 r90 top (schematic designator SW1)
U1 "AXP313A" WQFN-20_L3.0-W3.0-P0.40-BL-EP 1201.12,90.42 r180 top
U2 "H5TQ4G63EFR-RDC" FBGA96 198.77,985.68 r0 top
U3 "XR829" QFN-40_L5.0-W5.0-P0.40-BL-EP3.4 1273,652 r180 top
U4 "EMMC BGA153" FBGA-153_L13.0-W11.5 1375,1239 r90 top locked
U5 "Allwinner_H616" BGA284P65B1200_1400H125 688.77,970.68 r270 top locked
X1 "40M" OSC-SMD_4P-L2.0-W1.6-BL 1406,925 r90 top
X2 "24M" OSC-SMD_4P-L2.0-W1.6-BL 1023,967 r270 top

## Footprints (in the part's own frame and the unit in brackets; to place one, negate y for a bottom-side part, rotate by r counter-clockwise, add the part's x,y. Pads: shape width x height; smd on the part's side, far side on the other; paste and mask are expansions set on the pad)
BGA284P65B1200_1400H125 [mil]
  round 10 smd paste+0.98 mask+1.97: A1(-255.91,217.52) A2(-230.31,217.52) A4(-179.13,217.52) A6(-127.95,217.52) A8(-76.77,217.52) A10(-25.59,217.52) A12(25.59,217.52) A14(76.77,217.52) A16(127.95,217.52) A18(179.13,217.52) A19(204.72,217.52) A20(230.31,217.52) A21(255.91,217.52) B1(-255.91,191.93) B2(-230.31,191.93) B3(-204.72,191.93) B4(-179.13,191.93) B5(-153.54,191.93) B6(-127.95,191.93) B7(-102.36,191.93) B8(-76.77,191.93) B9(-51.18,191.93) B10(-25.59,191.93) B11(0,191.93) B12(25.59,191.93) B13(51.18,191.93) B14(76.77,191.93) B15(102.36,191.93) B16(127.95,191.93) B17(153.54,191.93) B18(179.13,191.93) B19(204.72,191.93) B20(230.31,191.93) B21(255.91,191.93) C1(-255.91,166.34) C2(-230.31,166.34) C3(-204.72,166.34) C4(-179.13,166.34) C5(-153.54,166.34) C6(-127.95,166.34) C7(-102.36,166.34) C8(-76.77,166.34) C9(-51.18,166.34) C10(-25.59,166.34) C11(0,166.34) C12(25.59,166.34) C13(51.18,166.34) C14(76.77,166.34) C15(102.36,166.34) C16(127.95,166.34) C17(153.54,166.34) C18(179.13,166.34) C19(204.72,166.34) C20(230.31,166.34) D1(-255.91,140.75) D2(-230.31,140.75) D3(-204.72,140.75) D4(-179.13,140.75) D5(-153.54,140.75) D7(-102.36,140.75) D10(-25.59,140.75) D11(0,140.75) D12(25.59,140.75) D13(51.18,140.75) D14(76.77,140.75) D15(102.36,140.75) D16(127.95,140.75) D18(179.13,140.75) D19(204.72,140.75) D20(230.31,140.75) D21(255.91,140.75) E2(-230.31,115.16) E3(-204.72,115.16) E4(-179.13,115.16) E5(-153.54,115.16) E6(-127.95,115.16) E18(179.13,115.16) E19(204.72,115.16) E20(230.31,115.16) F1(-255.91,89.57) F2(-230.31,89.57) F3(-204.72,89.57) F4(-179.13,89.57) F5(-153.54,89.57) F8(-76.77,89.57) F9(-51.18,89.57) F10(-25.59,89.57) F11(0,89.57) F12(25.59,89.57) F13(51.18,89.57) F14(76.77,89.57) F15(102.36,89.57) F18(179.13,89.57) F19(204.72,89.57) F20(230.31,89.57) F21(255.91,89.57) G2(-230.31,63.98) G3(-204.72,63.98) G4(-179.13,63.98) G5(-153.54,63.98) G6(-127.95,63.98) G8(-76.77,63.98) G9(-51.18,63.98) G10(-25.59,63.98) G11(0,63.98) G12(25.59,63.98) G13(51.18,63.98) G14(76.77,63.98) G15(102.36,63.98) G17(153.54,63.98) G18(179.13,63.98) G19(204.72,63.98) G20(230.31,63.98) G21(255.91,63.98) H1(-255.91,38.39) H2(-230.31,38.39) H3(-204.72,38.39) H4(-179.13,38.39) H5(-153.54,38.39) H6(-127.95,38.39) H8(-76.77,38.39) H9(-51.18,38.39) H10(-25.59,38.39) H11(0,38.39) H12(25.59,38.39) H13(51.18,38.39) H14(76.77,38.39) H15(102.36,38.39) H17(153.54,38.39) H18(179.13,38.39) H19(204.72,38.39) H20(230.31,38.39) J2(-230.31,12.8) J3(-204.72,12.8) J6(-127.95,12.8) J8(-76.77,12.8) J9(-51.18,12.8) J10(-25.59,12.8) J11(0,12.8) J12(25.59,12.8) J13(51.18,12.8) J14(76.77,12.8) J15(102.36,12.8) J17(153.54,12.8) J18(179.13,12.8) J19(204.72,12.8) J20(230.31,12.8) J21(255.91,12.8) K1(-255.91,-12.8) K2(-230.31,-12.8) K3(-204.72,-12.8) K4(-179.13,-12.8) K5(-153.54,-12.8) K6(-127.95,-12.8) K8(-76.77,-12.8) K9(-51.18,-12.8) K10(-25.59,-12.8) K11(0,-12.8) K12(25.59,-12.8) K13(51.18,-12.8) K14(76.77,-12.8) K15(102.36,-12.8) K18(179.13,-12.8) K19(204.72,-12.8) K20(230.31,-12.8) L2(-230.31,-38.39) L3(-204.72,-38.39) L4(-179.13,-38.39) L5(-153.54,-38.39) L6(-127.95,-38.39) L8(-76.77,-38.39) L9(-51.18,-38.39) L10(-25.59,-38.39) L11(0,-38.39) L12(25.59,-38.39) L13(51.18,-38.39) L14(76.77,-38.39) L15(102.36,-38.39) L18(179.13,-38.39) L19(204.72,-38.39) L20(230.31,-38.39) L21(255.91,-38.39) M1(-255.91,-63.98) M2(-230.31,-63.98) M3(-204.72,-63.98) M18(179.13,-63.98) M19(204.72,-63.98) M20(230.31,-63.98) N2(-230.31,-89.57) N3(-204.72,-89.57) N4(-179.13,-89.57) N5(-153.54,-89.57) N6(-127.95,-89.57) N7(-102.36,-89.57) N9(-51.18,-89.57) N10(-25.59,-89.57) N12(25.59,-89.57) N13(51.18,-89.57) N15(102.36,-89.57) N16(127.95,-89.57) N18(179.13,-89.57) N19(204.72,-89.57) N20(230.31,-89.57) N21(255.91,-89.57) P1(-255.91,-115.16) P2(-230.31,-115.16) P3(-204.72,-115.16) P4(-179.13,-115.16) P5(-153.54,-115.16) P6(-127.95,-115.16) P7(-102.36,-115.16) P9(-51.18,-115.16) P10(-25.59,-115.16) P12(25.59,-115.16) P13(51.18,-115.16) P15(102.36,-115.16) P16(127.95,-115.16) P18(179.13,-115.16) P20(230.31,-115.16) P21(255.91,-115.16) R1(-255.91,-140.75) R2(-230.31,-140.75) R3(-204.72,-140.75) R4(-179.13,-140.75) R5(-153.54,-140.75) R6(-127.95,-140.75) R9(-51.18,-140.75) R12(25.59,-140.75) R15(102.36,-140.75) R18(179.13,-140.75) R19(204.72,-140.75) R20(230.31,-140.75) R21(255.91,-140.75) T1(-255.91,-166.34) T2(-230.31,-166.34) T3(-204.72,-166.34) T4(-179.13,-166.34) T5(-153.54,-166.34) T6(-127.95,-166.34) T7(-102.36,-166.34) T8(-76.77,-166.34) T9(-51.18,-166.34) T10(-25.59,-166.34) T11(0,-166.34) T12(25.59,-166.34) T14(76.77,-166.34) T15(102.36,-166.34) T16(127.95,-166.34) T17(153.54,-166.34) T18(179.13,-166.34) T20(230.31,-166.34) T21(255.91,-166.34) U1(-255.91,-191.93) U2(-230.31,-191.93) U3(-204.72,-191.93) U4(-179.13,-191.93) U5(-153.54,-191.93) U6(-127.95,-191.93) U8(-76.77,-191.93) U9(-51.18,-191.93) U10(-25.59,-191.93) U11(0,-191.93) U12(25.59,-191.93) U13(51.18,-191.93) U14(76.77,-191.93) U15(102.36,-191.93) U16(127.95,-191.93) U17(153.54,-191.93) U18(179.13,-191.93) U19(204.72,-191.93) U20(230.31,-191.93) U21(255.91,-191.93) V1(-255.91,-217.52) V2(-230.31,-217.52) V3(-204.72,-217.52) V5(-153.54,-217.52) V8(-76.77,-217.52) V10(-25.59,-217.52) V12(25.59,-217.52) V15(102.36,-217.52) V17(153.54,-217.52) V19(204.72,-217.52) V20(230.31,-217.52) V21(255.91,-217.52)
  silkscreen extent -278,-238 278,238
C0402 [mm]
  rect 0.79x0.54 smd paste-100 mask+0.051: 1(-0.545,0) 2(0.545,0)
  silkscreen extent -1.17,-0.5 1.17,0.5
C0402-NSK [mil]
  rect 22x22 smd paste+0 mask+2: 1(-19.99,0) 2(20.01,0)
  silkscreen extent 0,-5 0,6
c0402-nsk_1 [mil]
  rect 22x22 smd paste+0 mask+2: 1(-20,0) 2(20,0)
  silkscreen extent 0,-5 0,6
C0603 [mm]
  rect 0.76x0.8 smd: 1(-0.76,0) 2(0.76,0)
  silkscreen extent -1.46,-0.7 1.46,0.7
CONN-SMD_2P-P1.25_053398-0X71 [mil]
  rect 31.5x63 smd paste+0 mask+2: 1(-24.8,57.1) 2(24.8,57.1)
  rect 78.7x118.1 smd paste+0 mask+2: 3(127.2,-57.1) 4(-127.1,-57.1)
  silkscreen extent -145,-102 145,48
CONN-SMD_40P-P0.80_10144517-042802LF [mil]
  rect 19.68x94.49 smd paste+0 mask+2: 1(299.2,77.76) 2(299.2,-111.22) 5(236.21,77.76) 6(236.21,-111.22) 9(173.22,77.76) 10(173.22,-111.22) 11(141.72,77.76) 12(141.72,-111.22) 15(78.73,77.76) 16(78.73,-111.22) 19(15.74,77.76) 20(15.74,-111.22) 21(-15.76,77.76) 22(-15.76,-111.22) 25(-78.75,77.76) 26(-78.75,-111.22) 29(-141.74,77.76) 30(-141.74,-111.22) 31(-173.24,77.76) 32(-173.24,-111.22) 35(-236.23,77.76) 36(-236.23,-111.22) 39(-299.22,77.76) 40(-299.22,-111.22)
  rect 19.69x94.49 smd paste+0 mask+2: 3(267.71,77.76) 4(267.71,-111.22) 7(204.71,77.76) 8(204.71,-111.22) 13(110.23,77.76) 14(110.23,-111.22) 17(47.23,77.76) 18(47.23,-111.22) 23(-47.25,77.76) 24(-47.25,-111.22) 27(-110.25,77.76) 28(-110.25,-111.22) 33(-204.73,77.76) 34(-204.73,-111.22) 37(-267.73,77.76) 38(-267.73,-111.22)
  round 35.43 hole 35.43 unplated paste+0: ""(-397.65,-16.73)
  round 51.18 hole 51.18 unplated paste+0: ""(397.63,-16.73)
  silkscreen extent -429,-151 429,158
FBGA96 [mil]
  round 14 smd: A1(-128.4,241.4) A2(-96.9,241.4) A3(-65.4,241.4) A7(60.6,241.4) A8(92.1,241.4) A9(123.6,241.4) B1(-128.4,209.9) B2(-96.9,209.9) B3(-65.4,209.9) B7(60.6,209.9) B8(92.1,209.9) B9(123.6,209.9) C1(-128.4,178.4) C2(-96.9,178.4) C3(-65.4,178.4) C7(60.6,178.4) C8(92.1,178.4) C9(123.6,178.4) D1(-128.4,146.9) D2(-96.9,146.9) D3(-65.4,146.9) D7(60.6,146.9) D8(92.1,146.9) D9(123.6,146.9) E1(-128.4,115.4) E2(-96.9,115.4) E3(-65.4,115.4) E7(60.6,115.4) E8(92.1,115.4) E9(123.6,115.4) F1(-128.4,83.9) F2(-96.9,83.9) F3(-65.4,83.9) F7(60.6,83.9) F8(92.1,83.9) F9(123.6,83.9) G1(-128.4,52.4) G2(-96.9,52.4) G3(-65.4,52.4) G7(60.6,52.4) G8(92.1,52.4) G9(123.6,52.4) H1(-128.4,20.9) H2(-96.9,20.9) H3(-65.4,20.9) H7(60.6,20.9) H8(92.1,20.9) H9(123.6,20.9) J1(-128.4,-10.6) J2(-96.9,-10.6) J3(-65.4,-10.6) J7(60.6,-10.6) J8(92.1,-10.6) J9(123.6,-10.6) K1(-128.4,-42.1) K2(-96.9,-42.1) K3(-65.4,-42.1) K7(60.6,-42.1) K8(92.1,-42.1) K9(123.6,-42.1) L1(-128.4,-73.6) L2(-96.9,-73.6) L3(-65.4,-73.6) L7(60.6,-73.6) L8(92.1,-73.6) L9(123.6,-73.6) M1(-128.4,-105.1) M2(-96.9,-105.1) M3(-65.4,-105.1) M7(60.6,-105.1) M8(92.1,-105.1) M9(123.6,-105.1) N1(-128.4,-136.6) N2(-96.9,-136.6) N3(-65.4,-136.6) N7(60.6,-136.6) N8(92.1,-136.6) N9(123.6,-136.6) P1(-128.4,-168.1) P2(-96.9,-168.1) P3(-65.4,-168.1) P7(60.6,-168.1) P8(92.1,-168.1) P9(123.6,-168.1) R1(-128.4,-199.6) R2(-96.9,-199.6) R3(-65.4,-199.6) R7(60.6,-199.6) R8(92.1,-199.6) R9(123.6,-199.6) T1(-128.4,-231.1) T2(-96.9,-231.1) T3(-65.4,-231.1) T7(60.6,-231.1) T8(92.1,-231.1) T9(123.6,-231.1)
  silkscreen extent -168,-255 149,275
FBGA-153_L13.0-W11.5 [mm]
  oval 0.2x0.305 smd paste-100 mask+0.051: A1(-3.25,3.25) A2(-2.75,3.25) A3(-2.25,3.25) A4(-1.75,3.25) A5(-1.25,3.25) A6(-0.75,3.25) A7(-0.25,3.25) A8(0.25,3.25) A9(0.75,3.25) A10(1.25,3.25) A11(1.75,3.25) A12(2.25,3.25) A13(2.75,3.25) A14(3.25,3.25) P1(-3.25,-3.25) P2(-2.75,-3.25) P3(-2.25,-3.25) P4(-1.75,-3.25) P5(-1.25,-3.25) P6(-0.75,-3.25) P7(-0.25,-3.25) P8(0.25,-3.25) P9(0.75,-3.25) P10(1.25,-3.25) P11(1.75,-3.25) P12(2.25,-3.25) P13(2.75,-3.25) P14(3.25,-3.25)
  oval 0.305x0.2 smd paste-100 mask+0.051: B1(-3.25,2.75) B14(3.25,2.75) C1(-3.25,2.25) C14(3.25,2.25) D1(-3.25,1.75) D14(3.25,1.75) E1(-3.25,1.25) E14(3.25,1.25) F1(-3.25,0.75) F14(3.25,0.75) G1(-3.25,0.25) G14(3.25,0.25) H1(-3.25,-0.25) H14(3.25,-0.25) J1(-3.25,-0.75) J14(3.25,-0.75) K1(-3.25,-1.25) K14(3.25,-1.25) L1(-3.25,-1.75) L14(3.25,-1.75) M1(-3.25,-2.25) M14(3.25,-2.25) N1(-3.25,-2.75) N14(3.25,-2.75)
  round 0.25 smd paste-100 mask+0.051: B2(-2.75,2.75) B3(-2.25,2.75) B4(-1.75,2.75) B5(-1.25,2.75) B6(-0.75,2.75) B7(-0.25,2.75) B8(0.25,2.75) B9(0.75,2.75) B10(1.25,2.75) B11(1.75,2.75) B12(2.25,2.75) B13(2.75,2.75) C2(-2.75,2.25) C3(-2.25,2.25) C4(-1.75,2.25) C5(-1.25,2.25) C6(-0.75,2.25) C7(-0.25,2.25) C8(0.25,2.25) C9(0.75,2.25) C10(1.25,2.25) C11(1.75,2.25) C12(2.25,2.25) C13(2.75,2.25) D2(-2.75,1.75) D3(-2.25,1.75) D4(-1.75,1.75) D12(2.25,1.75) D13(2.75,1.75) E2(-2.75,1.25) E3(-2.25,1.25) E5(-1.25,1.25) E6(-0.75,1.25) E7(-0.25,1.25) E8(0.25,1.25) E9(0.75,1.25) E10(1.25,1.25) E12(2.25,1.25) E13(2.75,1.25) F2(-2.75,0.75) F3(-2.25,0.75) F5(-1.25,0.75) F10(1.25,0.75) F12(2.25,0.75) F13(2.75,0.75) G2(-2.75,0.25) G3(-2.25,0.25) G5(-1.25,0.25) G10(1.25,0.25) G12(2.25,0.25) G13(2.75,0.25) H2(-2.75,-0.25) H3(-2.25,-0.25) H5(-1.25,-0.25) H10(1.25,-0.25) H12(2.25,-0.25) H13(2.75,-0.25) J2(-2.75,-0.75) J3(-2.25,-0.75) J5(-1.25,-0.75) J10(1.25,-0.75) J12(2.25,-0.75) J13(2.75,-0.75) K2(-2.75,-1.25) K3(-2.25,-1.25) K5(-1.25,-1.25) K6(-0.75,-1.25) K7(-0.25,-1.25) K8(0.25,-1.25) K9(0.75,-1.25) K10(1.25,-1.25) K12(2.25,-1.25) K13(2.75,-1.25) L2(-2.75,-1.75) L3(-2.25,-1.75) L12(2.25,-1.75) L13(2.75,-1.75) M2(-2.75,-2.25) M3(-2.25,-2.25) M4(-1.75,-2.25) M5(-1.25,-2.25) M6(-0.75,-2.25) M7(-0.25,-2.25) M8(0.25,-2.25) M9(0.75,-2.25) M10(1.25,-2.25) M11(1.75,-2.25) M12(2.25,-2.25) M13(2.75,-2.25) N2(-2.75,-2.75) N3(-2.25,-2.75) N4(-1.75,-2.75) N5(-1.25,-2.75) N6(-0.75,-2.75) N7(-0.25,-2.75) N8(0.25,-2.75) N9(0.75,-2.75) N10(1.25,-2.75) N11(1.75,-2.75) N12(2.25,-2.75) N13(2.75,-2.75)
  silkscreen extent -5.84,-6.61 5.84,6.6
IND-SMD_L2.0-W1.6_1 [mm]
  rect 1x1.72 smd paste+0 mask+0.051: 1(0.828,0) 2(-0.828,0)
  silkscreen extent -1.14,-1.02 1.14,1.02
LED0805_G [mil]
  rrect50% 40x50 smd: 1(-38.4,0) 2(38.4,0)
  silkscreen extent -70,-36 82,36, body extent -39,-25 39,25, height 32
OSC-SMD_4P-L2.0-W1.6-BL [mil]
  rect 30x20 smd: 1(-25,-20) 2(25,-20) 3(25,20) 4(-25,20)
QFN-40_L5.0-W5.0-P0.40-BL-EP3.4 [mm]
  oval 0.2x0.8 smd paste+0 mask+0.05: 1(-1.8,-2.499) 2(-1.4,-2.499) 3(-1,-2.499) 4(-0.6,-2.499) 5(-0.2,-2.499) 6(0.2,-2.499) 7(0.6,-2.499) 8(1,-2.499) 9(1.4,-2.499) 10(1.8,-2.499) 21(1.8,2.499) 22(1.4,2.499) 23(1,2.499) 24(0.6,2.499) 25(0.2,2.499) 26(-0.2,2.499) 27(-0.6,2.499) 28(-1,2.499) 29(-1.4,2.499) 30(-1.8,2.499)
  oval 0.8x0.2 smd paste+0 mask+0.05: 11(2.499,-1.8) 12(2.499,-1.4) 13(2.499,-1) 14(2.499,-0.6) 15(2.499,-0.2) 16(2.499,0.2) 17(2.499,0.6) 18(2.499,1) 19(2.499,1.4) 20(2.499,1.8) 31(-2.499,1.8) 32(-2.499,1.4) 33(-2.499,1) 34(-2.499,0.6) 35(-2.499,0.2) 36(-2.499,-0.2) 37(-2.499,-0.6) 38(-2.499,-1) 39(-2.499,-1.4) 40(-2.499,-1.8)
  rect 3.4x3.4 smd paste+0 mask+0.05: 41(0,0)
  silkscreen extent -2.7,-3.35 2.7,2.7
R0402-NSK_2 [mil]
  rect 19.68x22 smd paste+0 mask+2: 1(-18,0) 2(18,0)
R0805_L [mm]
  rect 1x1.3 smd: 1(-0.95,0) 2(0.95,0)
  silkscreen extent -1.7,-0.89 1.7,0.89, body extent -1,-0.62 1,0.63, height 0.5
RF-SMD_FRF05002-JSS103M [mm]
  rect 1x1.05 smd paste+0 mask+0.05: 1(0,0.762)
  rect 1.05x2.2 smd paste+0 mask+0.05: 2(-1.475,-0.762) 3(1.475,-0.762)
  silkscreen extent -1.3,-2.35 1.3,0.63
SOD-323_L1.8-W1.3-LS2.5-NSK [mil]
  rect 33.3x17.9 smd paste+0 mask+2: 1(-43.2,0) 2(43.2,0)
  silkscreen extent -18,-10 -6,7
SW-SMD_L3.9-W2.9-P4.15-LS5.0 [mm]
  rect 1.35x2 smd paste+0 mask+0.051: 1(-2.25,0) 2(2.25,0)
  silkscreen extent -2,-1.45 2,1.45
WQFN-20_L3.0-W3.0-P0.40-BL-EP [mil]
  rect 7.9x31.5 smd paste+0 mask+2: 1(-31.5,-59.1) 2(-15.8,-59.1) 3(0,-59.1) 4(15.7,-59.1) 5(31.5,-59.1) 11(31.5,59.1) 12(15.7,59.1) 13(0,59.1) 14(-15.8,59.1) 15(-31.5,59.1)
  rect 31.5x7.9 smd paste+0 mask+2: 6(59.1,-31.5) 7(59.1,-15.7) 8(59.1,0) 9(59.1,15.7) 10(59.1,31.5) 16(-59.1,31.5) 17(-59.1,15.8) 18(-59.1,0) 19(-59.1,-15.7) 20(-59.1,-31.5)
  rect 66.9x66.9 smd paste+0 mask+2: 21(0,0)
  silkscreen extent -61,-83 61,61

## Part data
3.3V 5V: library part LED, "贴片LED"
C1 C3 C5 C12 C14 C15 C16 C17 C18 C19 C20 C21 C22 C23 C24 C25 C26 C27 C28 C29 C30 C31 C32 C33 C34 C35 C36 C37 C38 C39 C40 C41 C42 C43 C44 C45 C46 C47 C48 C49 C50 C51 C52 C53 C54 C55 C56 C57 C58 C59 C60 C61 C62 C63 C64 C65 C66 C67 C68 C69 C70 C71 C72 C73 C74 C75 C76 C77 C78 C79 C80 C81 C82 C83 C84 C85 C92 C93 C94 C95 C96 C97 C98 C99 C100: library part CAP_0402
C2 C4 C6 C7 C8 C9 C10 C11 C13: library part CAP_0603
C86 C87: library part FN15X104K250PNG
L1 L2 L3: library part CKCS201610-2.2uH/M_2
R1 R2 R3 R4 R5 R6 R7 R8 R9 R10 R11 R12 R13 R14 R17 R18 R19 R20 R21 R22 R23 R24 R25 R26 R31 R32 R48 R49 R50 R51 R52 R53 R54: library part Res_0402
R28: library part TR0402D10K0Q1025Z
R55 R56 R57 R58 R59 R60: library part R, "贴片电阻"
U1: library part AXP1530
X1 X2: library part SX32Y024000BC1T

## Free pads (board coordinates)
  round 196.85 hole 118.11: 1(0,0) 1(0,1630) 1(1656,0) 1(1656,1630)
  round 118.11 hole 86.61: 1(66.94,574.81) 1(867.12,1373.59)

## Via types
v1: diameter 17.7, hole 7.91, Top Layer to Bottom Layer, tented both sides, 612 vias

## Nets (pads, with @x,y where several pads share a name; then routed paths per layer and width w, separated by ;. In a path a pad name is that pad's centre, name@x,y a point inside that pad or via, vN(x,y) a via of type N, cw(c..) or ccw(c..) an arc to the next point about the centre after c; other vN are vias at no path point)
1V8: C1.2 C14.2 C15.2 C16.2 C98.1 R2.1 R3.1 R49.2 U1.15 U5.D11 U5.D12 U5.F18 U5.H17 U5.H20 U5.L14 | length 2082.6
  Top Layer w8: v1(636,881) 637.47,881 U5.L14@650.38,893.91 ; v1(715,728) 715,728.21 U5.H20@727.16,740.37 ; U5.D12@829.52,945.09 842,957.57 v1(842,958) 842,958.19 U5.D11@829.52,970.68 ; R3.1@1030.44,135.78 1030,136.22 1030,176.34 R2.1@1030.44,176.78 ; C1.2@1258,-33.04 1264.46,-39.5 1324.16,-39.5 1332.16,-47.5 1337.16,-47.5 1347,-57.34 R49.2@1347,-58.5
  Top Layer w10: U5.H17@727.16,817.14 744.02,834 768,834 786,816 786,799.21 U5.F18@778.34,791.55 790.88,779 v1(791,779)
  PWR3 w18: v1(636,881) 636,842 654,824 670,824 684,838 784.47,838 808,814.47
  PWR3 w25: v1(715,728) 772,671 ; v1(791,779) 803,779 808,774 ; v1(842,958) 829,958 808,937 808,814.47 808,774 ; v1@1029.85,185 1220.07,-5.22 v1(1244.72,-5.22) ; v1(1031.53,185) 1022.5,185 892.15,315.35 892.15,485.71 772,605.86 772,671 ; 772,671 816,715 816,766 808,774
  Bottom Layer w5: C16.2@618,871.01 626.01,871.01 v1(636,881)
  Bottom Layer w8: v1(842,958) C98.1@874.01,958
  Bottom Layer w10: v1(715,728) 716,727 C15.2@716,708.01 ; C14.2@748,704.01 742,710.01 742,765 756,779 v1(791,779)
3V3: C3.2 H1.2 H1.18 H2.35 R48.2 R55.1 R56.1 R57.1 R58.1 R59.1 R60.1 U1.12 | length 965.2
  Top Layer w6: v1(1177,-12.5) 1177,-33.78 C3.2@1177.44,-34.22
  Top Layer w8: v1(1177,-12.5) 1185.42,-4.08 U1.12@1185.42,31.32
  Top Layer w30: v1(150,1447.4) v1(182.5,1447.4) v1(208.75,1447.4) v1(238.12,1447.4) v1(265.1,1447.4) R55.1@267.5,1447.4 ; v1(1282.5,1587.4) v1(1307.5,1587.4) v1(1338.75,1587.4) R58.1@1370,1587.4 v1(1370,1587.5) ; v1(1634.51,472.5) 1635.96,473.95 v1(1635.96,502.5) v1(1635.96,527.5) v1(1635.96,556.05) R59.1@1637.4,557.5
  Bottom Layer w5: v1(415,-5) 416.77,-6.77 H2.35@416.77,-77.76
  Bottom Layer w20: v1(345,1605.73) 364.12,1586.62 ; H1.2@353.8,1518.78 353.96,1518.94 353.96,1576.46 364.12,1586.62 ; H1.18@605.77,1518.78 605.92,1518.94 605.92,1570.14 620,1584.22 620,1600.78 608.28,1612.5 390,1612.5 364.12,1586.62
  Bottom Layer w30: v1(1485,347.5) 1485.5,347 R48.2@1557.5,347
3V3_CPU: C26.2 C27.2 C29.2 R55.2 R56.2 U5.D7 U5.D10 U5.E18 U5.F5 U5.J6 U5.M18 | length 800
  Top Layer w8: U5.E18@803.93,791.55 803.93,807.93 814.17,818.17 823.51,827.51 839.5,827.51 v1(841.36,829.36) ; v1(818,1007.78) U5.D10@829.52,996.27
  Top Layer w10: U5.M18@624.79,791.55 637,779.33 v1(637,779) ; U5.J6@701.57,1098.63 v1(714.92,1111.92) ; U5.F5@778.34,1124.22 778.34,1084.66 803,1060 v1(816,1060) v1@822,1066 ; v1@822,1066 822.48,1066 U5.D7@829.52,1073.04 829.04,1073.04 v1@822,1066
  Top Layer w18: 814.17,818.17 805,827.35 805,994.78 v1@816,1005.78 ; v1(816,1060) v1@816,1005.78 ; v1(818,1007.78) v1@816,1005.78
  Top Layer w30: v1(137.6,1372.6) R56.2@150,1372.6 154.25,1372.6 154.35,1372.5 v1(165,1372.5) ; R56.2@165,1372.6 v1(190,1372.6) 212.4,1372.6 v1(212.5,1372.5) v1(240,1372.5) 267.4,1372.5 R55.2@267.5,1372.6 v1(267.5,1372.5)
  Bottom Layer w8: v1(841.36,829.36) 858.35,846.36 858.35,850.36 863.98,855.99 868.99,855.99 C29.2@868.99,900
  Bottom Layer w12: C27.2@783,1081.99 790.05,1081.99 v1@818,1054.05 ; v1(816,1060) 818,1058 v1@818,1054.05 ; v1(818,1007.78) v1@818,1054.05
3V3_EMMC: C75.2 C76.2 C77.2 C81.2 R50.1 R51.1 R57.2 R58.2 U4.C6 U4.E6 U4.F5 U4.J10 U4.K9 U4.M4 U4.N4 U4.P3 U4.P5 | length 671.9
  Top Layer w6: U4.P3@1502.95,1150.41 U4.N4@1483.27,1170.1 U4.P5@1502.94,1189.78
  Top Layer w8: U4.C6@1286.41,1209.48 U4.E6@1325.78,1209.48 U4.F5@1345.48,1189.78 1345.48,1171.52 v1(1346,1171) ; U4.J10@1404.52,1288.22 U4.K9@1424.22,1268.52 1444,1248.74 v1(1444,1240) ; U4.M4@1463.59,1170.1 U4.N4@1483.27,1170.1 ; U4.P3@1502.95,1150.41 v1(1520.59,1150.41) ; v1@1521,1150 v1(1520.59,1150.41) ; C75.2@1675.15,1111.58 C76.2@1675.15,1150.27 ; C81.2@1675.15,1231.64 C76.2@1675.15,1150.27 ; v1(1520.59,1150.41) 1675,1150.41 C76.2@1675.15,1150.27
  Top Layer w30: v1(1282.5,1512.6) v1(1310,1512.6) v1(1340,1512.6) v1(1370,1512.6)
  Bottom Layer w10: R51.1@1397,1090 1397,1088 v1(1419,1066) 1419,1070 R50.1@1439,1090
3V3_WIFI: C28.2 C68.1 C69.1 C86.2 R17.1 R19.1 R20.1 R21.1 R22.1 R23.1 R24.1 R25.1 R59.2 R60.2 U3.11 U3.25 U3.30 U3.37 | length 897.2
  Top Layer w7: R19.1@1276,853 v1@1294,870.99 ; v1(1294,873) v1@1294,871 ; R20.1@1312,853 v1@1294,871
  Top Layer w8: R17.1@1058,565 R24.1@1058,607 R25.1@1058,653 R23.1@1058,697 R22.1@1058,738 R21.1@1058,776 1095,813 C68.1@1095.98,813 ; v1(1089,834) 1095.98,827.02 C68.1@1095.98,813 ; U3.11@1174.6,722.87 1161.13,722.87 1155,729 1155,767 1109,813 C68.1@1095.98,813 ; C69.1@1265,480 1265.13,480.13 v1(1265.13,504.3) U3.25@1265.13,553.6 ; U3.30@1343.87,553.6 1343.87,532.13 1381,495 v1(1381,483) 1382.01,484.01 1441.49,484.01 C28.2@1442.5,485.01 ; U3.37@1371.4,675.62 1422.38,675.62 v1(1423,675) 1438,675 C86.2@1449,664
  Top Layer w30: R60.2@1559.71,472.5 v1(1561.15,473.95) v1(1561.15,502.5) 1561.15,556.05 R59.2@1562.6,557.5 ; v1(1562.6,535.1) R59.2@1562.6,557.5 ; v1(1562.6,562.4) R59.2@1562.6,557.5
AGND: C92.1 C93.1 R31.1 R32.2 U5.H18 | length 131.3
  Top Layer w8: v1(715,804) 727.16,791.84 U5.H18@727.16,791.55
  Bottom Layer w8: C92.1@715,780.99 C92.1@716.99,779
  Bottom Layer w18: C92.1@715,780.99 716.99,782.99 C93.1@716.99,819 ; C93.1@715,819.3 715,853 714,854 R32.2@751,854
AP_REG_ON: U3.35 U5.C9 | length 1207.8
  Top Layer w4.5: v1(842,1034) 842.96,1034 U5.C9@855.11,1021.86
  Top Layer w5: U3.35@1371.4,644.13 1397.87,644.13 1407,635 1407,605 v1(1409,603)
  Bottom Layer w4: v1(842,1034) 856.85,1019.15 877.15,1019.15 891,1033 1053,1033 1087,999 1087,888 1054,855 1054,732 1065,721 1065,669 1094,640 1094,565 1129,530 1190,530 1214,554 1397,554 1410,567 1410,602 v1(1409,603)
BT_RSTN: U3.23 U5.C10 | length 1000.9
  Top Layer w4: v1(842,1009) 842.37,1009 U5.C10@855.11,996.27 ; v1(1143,472) 1148,467 1189,467 1233.63,511.63 U3.23@1233.63,553.6
  Bottom Layer w4: v1(842,1009) 847,1004 881,1004 897,1020 1048,1020 1074,994 1074,893 1041,860 1041,728 1053,716 1053,663 1083,633 1083,560 1112,531 1112,503 v1(1143,472)
D0+: H2.24 U5.J20 | length 692.6
  Top Layer w5: v1(690,729) 690.2,729 U5.J20@701.57,740.37
  Bottom Layer w5: H2.24@605.75,111.22 600,116.97 600,215 618.5,233.5 618.5,539.5 685,606 685,675 670.64,689.36 670.64,721.91 677.19,728.47 v1(690,729)
D0-: H2.26 U5.J19 | length 719.4
  Top Layer w5: v1(689,753) 701.57,765.57 U5.J19@701.57,765.96
  Bottom Layer w5: H2.26@574.25,111.22 581.59,118.56 581.59,209.59 609.5,237.5 609.5,543.5 676,610 676,671.27 661.64,685.64 661.64,725.64 v1(689,753)
D1+: H2.32 U5.M20 | length 689.2
  Top Layer w5: v1(555,547.5) 555,582.5 622,649.5 622,737.58 U5.M20@624.79,740.37
  Bottom Layer w5: H2.32@479.76,111.22 479.76,270.03 555,345.27 v1(555,547.5)
D1-: H2.34 U5.M19 | length 727.9
  Top Layer w5: v1(522.5,547.5) 522.5,567.23 612,656.73 612,753.17 U5.M19@624.79,765.96
  Bottom Layer w5: H2.34@448.27,111.22 448.27,255.77 522.5,330 v1(522.5,547.5)
D2+: H2.36 U5.L20 | length 734.2
  Top Layer w5: v1(639,730) 649.37,740.37 U5.L20@650.38,740.37
  Bottom Layer w5: H2.36@416.77,111.22 416.77,160.96 407.5,170.23 407.5,230 500,322.5 500,560 628,688 628,719 v1(639,730)
D2-: H2.38 U5.L19 | length 764.5
  Top Layer w5: v1(638,753) 650.38,765.38 U5.L19@650.38,765.96
  Bottom Layer w5: H2.38@385.27,111.22 385.27,160.96 393.36,169.05 393.36,235.86 485.86,328.36 485.86,565.86 617.5,697.5 617.5,732.5 v1(638,753)
D3+: H2.28 U5.K20 | length 703.4
  Top Layer w5: v1(654,621) 672,639 672,736.4 U5.K20@675.97,740.37
  Bottom Layer w5: H2.28@542.75,111.22 542.75,205.25 582.14,244.64 582.14,573.14 636,627 648,627 v1(654,621)
D3-: H2.30 U5.K19 | length 729.8
  Top Layer w5: v1(653,646) 663,656 663,752.99 U5.K19@675.97,765.96
  Bottom Layer w5: H2.30@511.26,111.22 511.26,184.55 533.75,207.04 533.75,209.98 573.14,249.36 573.14,577.86 632.27,637 644,637 v1(653,646)
EPHY_RTX: R26.1 U5.B19 | length 49.6
  Top Layer w8: U5.B19@880.7,765.96 v1(892.65,754) v1@893,754
  Bottom Layer w10: R26.1@887,724 887,748.34 v1(892.65,754)
EPHY_RXN: H2.11 U5.B21 | length 1027.6
  Top Layer w5: U5.B21@880.7,714.77 880.7,638.3 945,574 v1(945,564)
  Bottom Layer w5: H2.11@794.72,-77.76 794.72,-28.02 806,-16.74 806,26 837.47,57.47 964.73,57.47 973.63,66.37 973.63,343.63 1018.75,388.75 1018.75,428.75 975,472.5 975,549 957.93,566.07 947.07,566.07 v1(945,564)
EPHY_RXP: H2.9 U5.B20 | length 1063
  Top Layer w5: U5.B20@880.7,740.37 893,728.06 893,643 951,585 v1(966,585)
  Bottom Layer w5: H2.9@826.22,-77.76 826.22,-28.02 815,-16.8 815,22.27 841.2,48.47 968.46,48.47 987.49,67.51 987.49,342.95 1032,387.46 1032,428.23 984,476.23 984,555 960.75,578.25 960.75,579.75 v1(966,585)
EPHY_TXN: H2.7 U5.A20 | length 1022.5
  Top Layer w5: U5.A20@906.29,740.37 917.29,729.37 917.29,701.71 977,642 v1(977,635)
  Bottom Layer w5: H2.7@857.71,-77.76 865.06,-70.42 865.06,2.56 875,12.5 977.73,12.5 1005.6,40.37 1005.6,335.6 1050,380 1050,450 1051.14,451.14 1019,483.27 1019,579.31 1003,595.31 1003,616 984,635 v1(977,635)
EPHY_TXP: H2.5 U5.A19 | length 1026.8
  Top Layer w5: U5.A19@906.29,765.96 934,738.24 934,701 980,655 v1(991,655)
  Bottom Layer w5: H2.5@889.21,-77.76 896.55,-70.42 896.55,-16.74 916.79,3.5 981.46,3.5 1015,37.04 1015,239.45 1014.9,239.56 1014.9,252.27 1015,252.38 1015,330 1065.14,380.14 1065.14,449.86 1028,487 1028,587 1015,600 1015,622 991,646 v1(991,655)
FEL: FEL.1 U5.B17 | length 1856.2
  Top Layer w8: U5.B17@880.7,817.14 887.83,810 925,810 942,793 v1(960,793)
  Top Layer w10: FEL.1@-90,226.41 -90,184.58 -82.5,177.08 v1(-82.5,175)
  Inner2 w10: v1(960,793) 960,787 1055,692 1055,535 996,476 996,471.57 997.5,470.07 v1(997.5,416.78)
  Inner4 w10: v1(-82.5,175) -25,117.5 365,117.5 385,137.5 747.5,137.5 780,170 780,245 951.78,416.78 v1(997.5,416.78)